# Altium PCB Armadeus.PcbDoc (part 1 of 3)
Units mm, origin at the board's own origin, x right, y up, seen from the top; angles counter-clockwise.
Board outline 152.4 x 101.6 mm, 6 copper layers (Top Layer, MidLayer1, MidLayer2, MidLayer3, MidLayer4, Bottom Layer); 160 components, 306 nets, 1227 pads, 661 vias.
Unrouted connection lines stored in the file: 23.
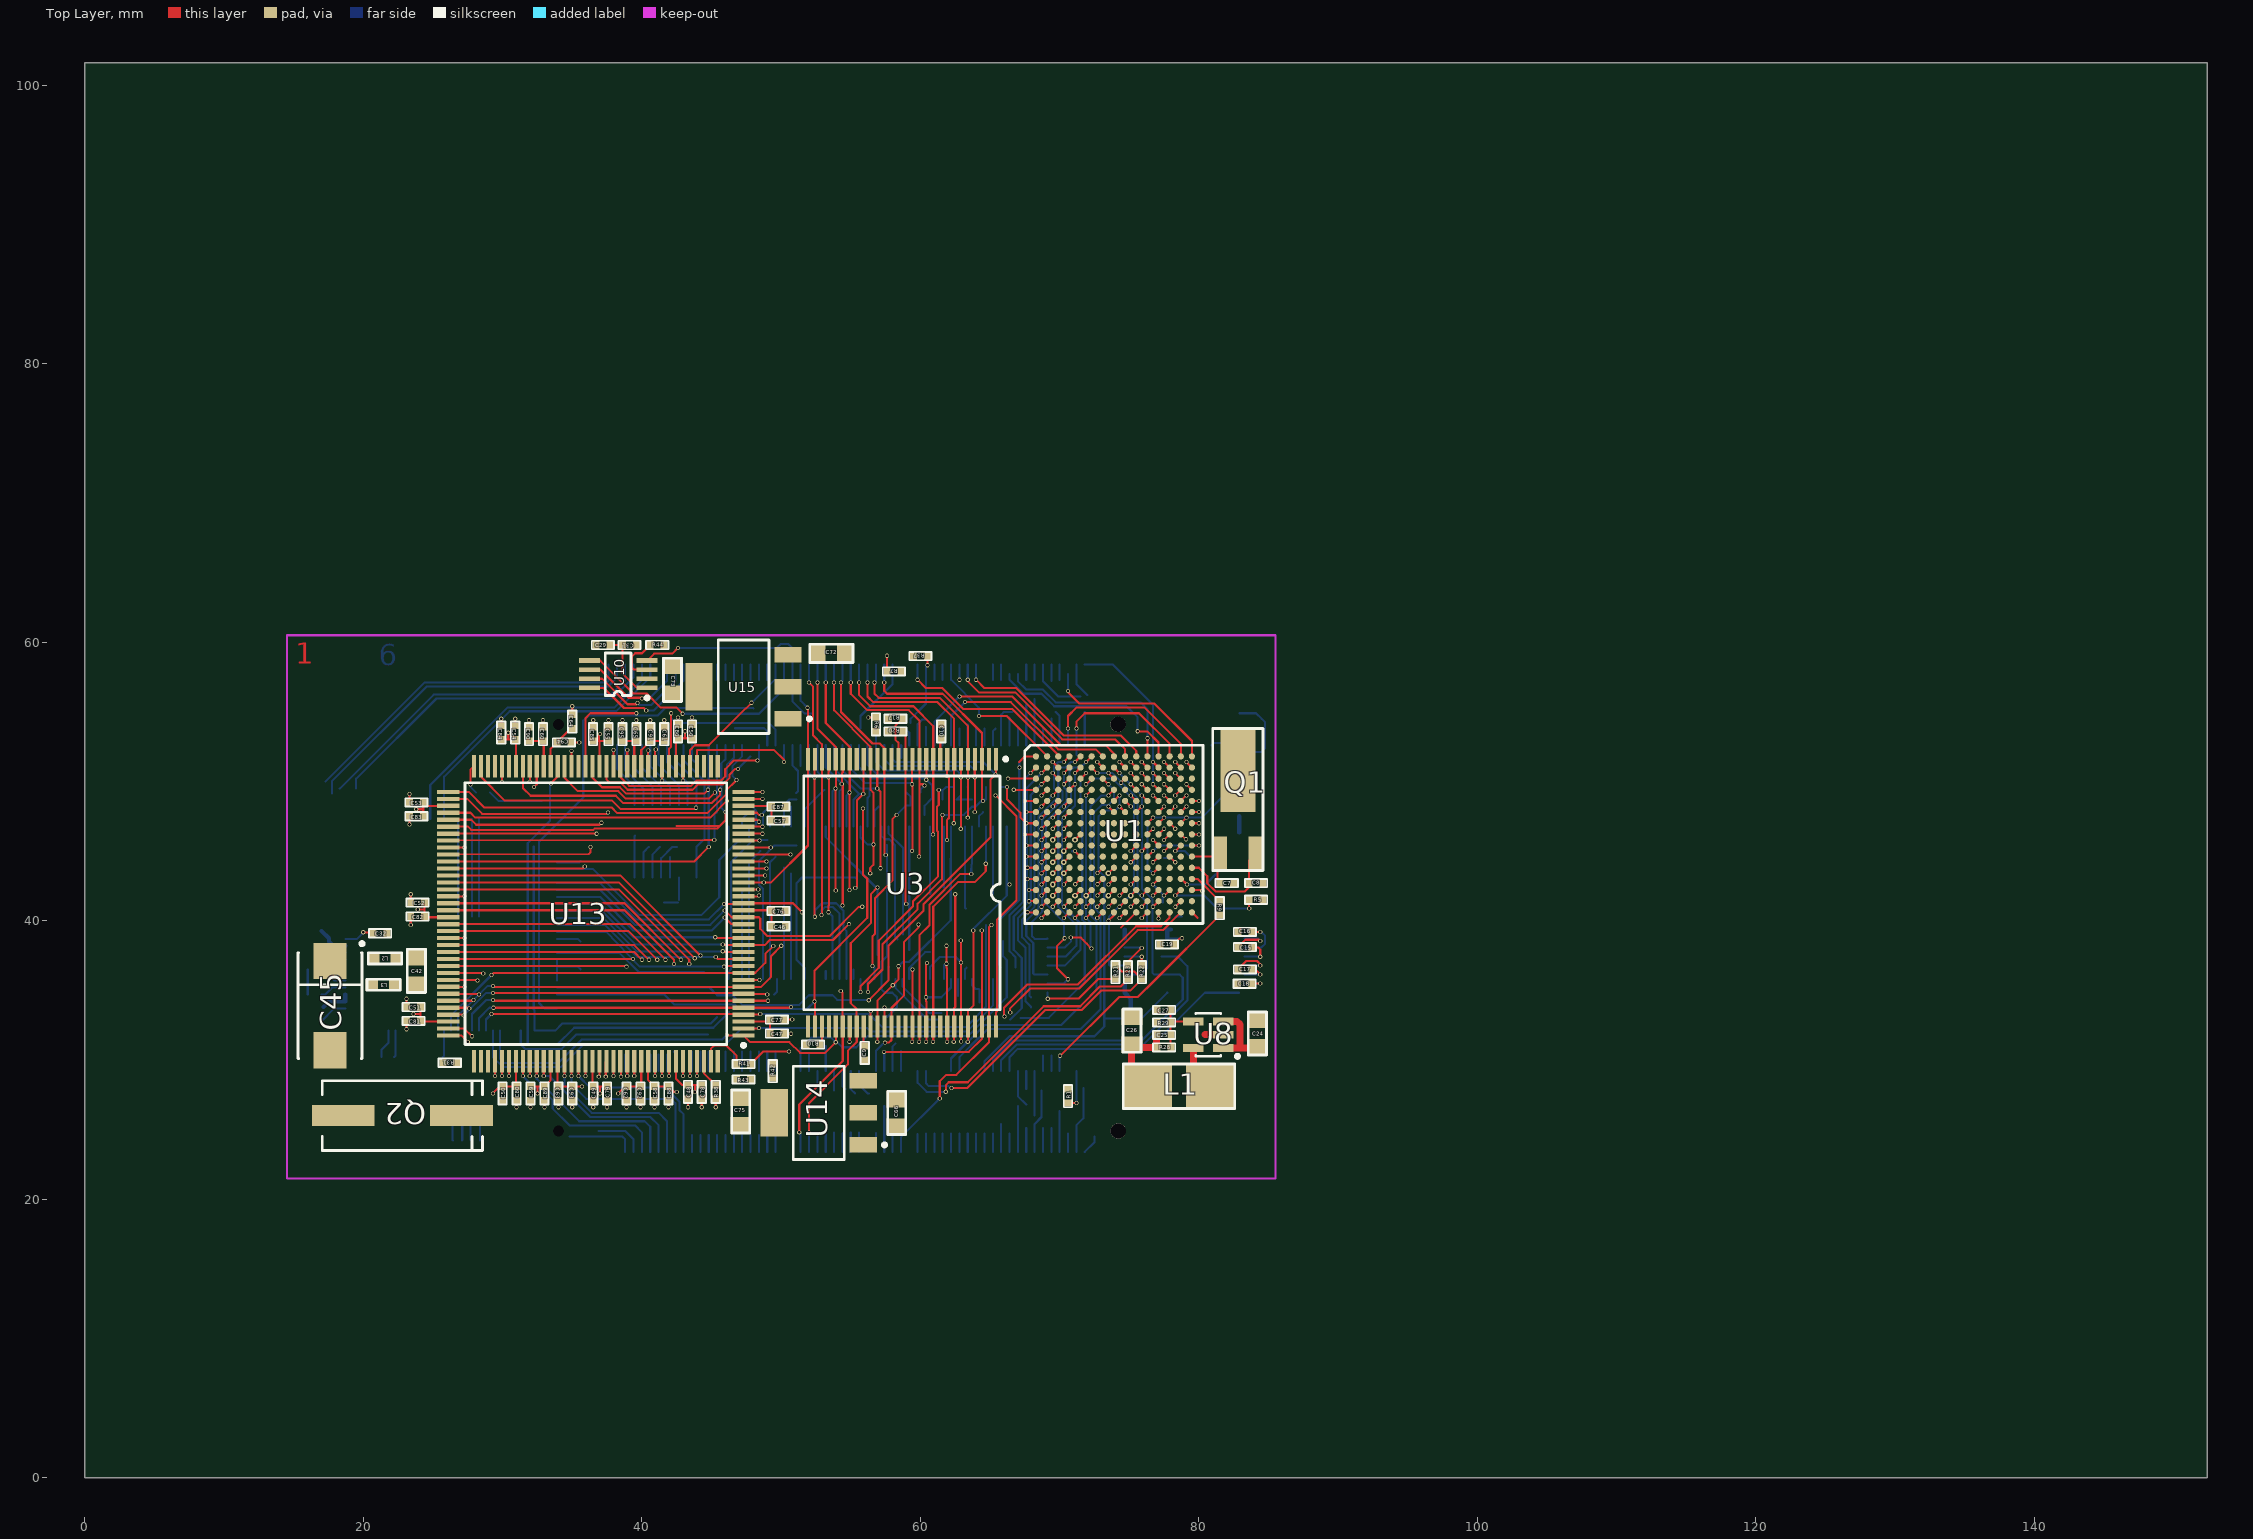
[diagram p0: Top Layer view]
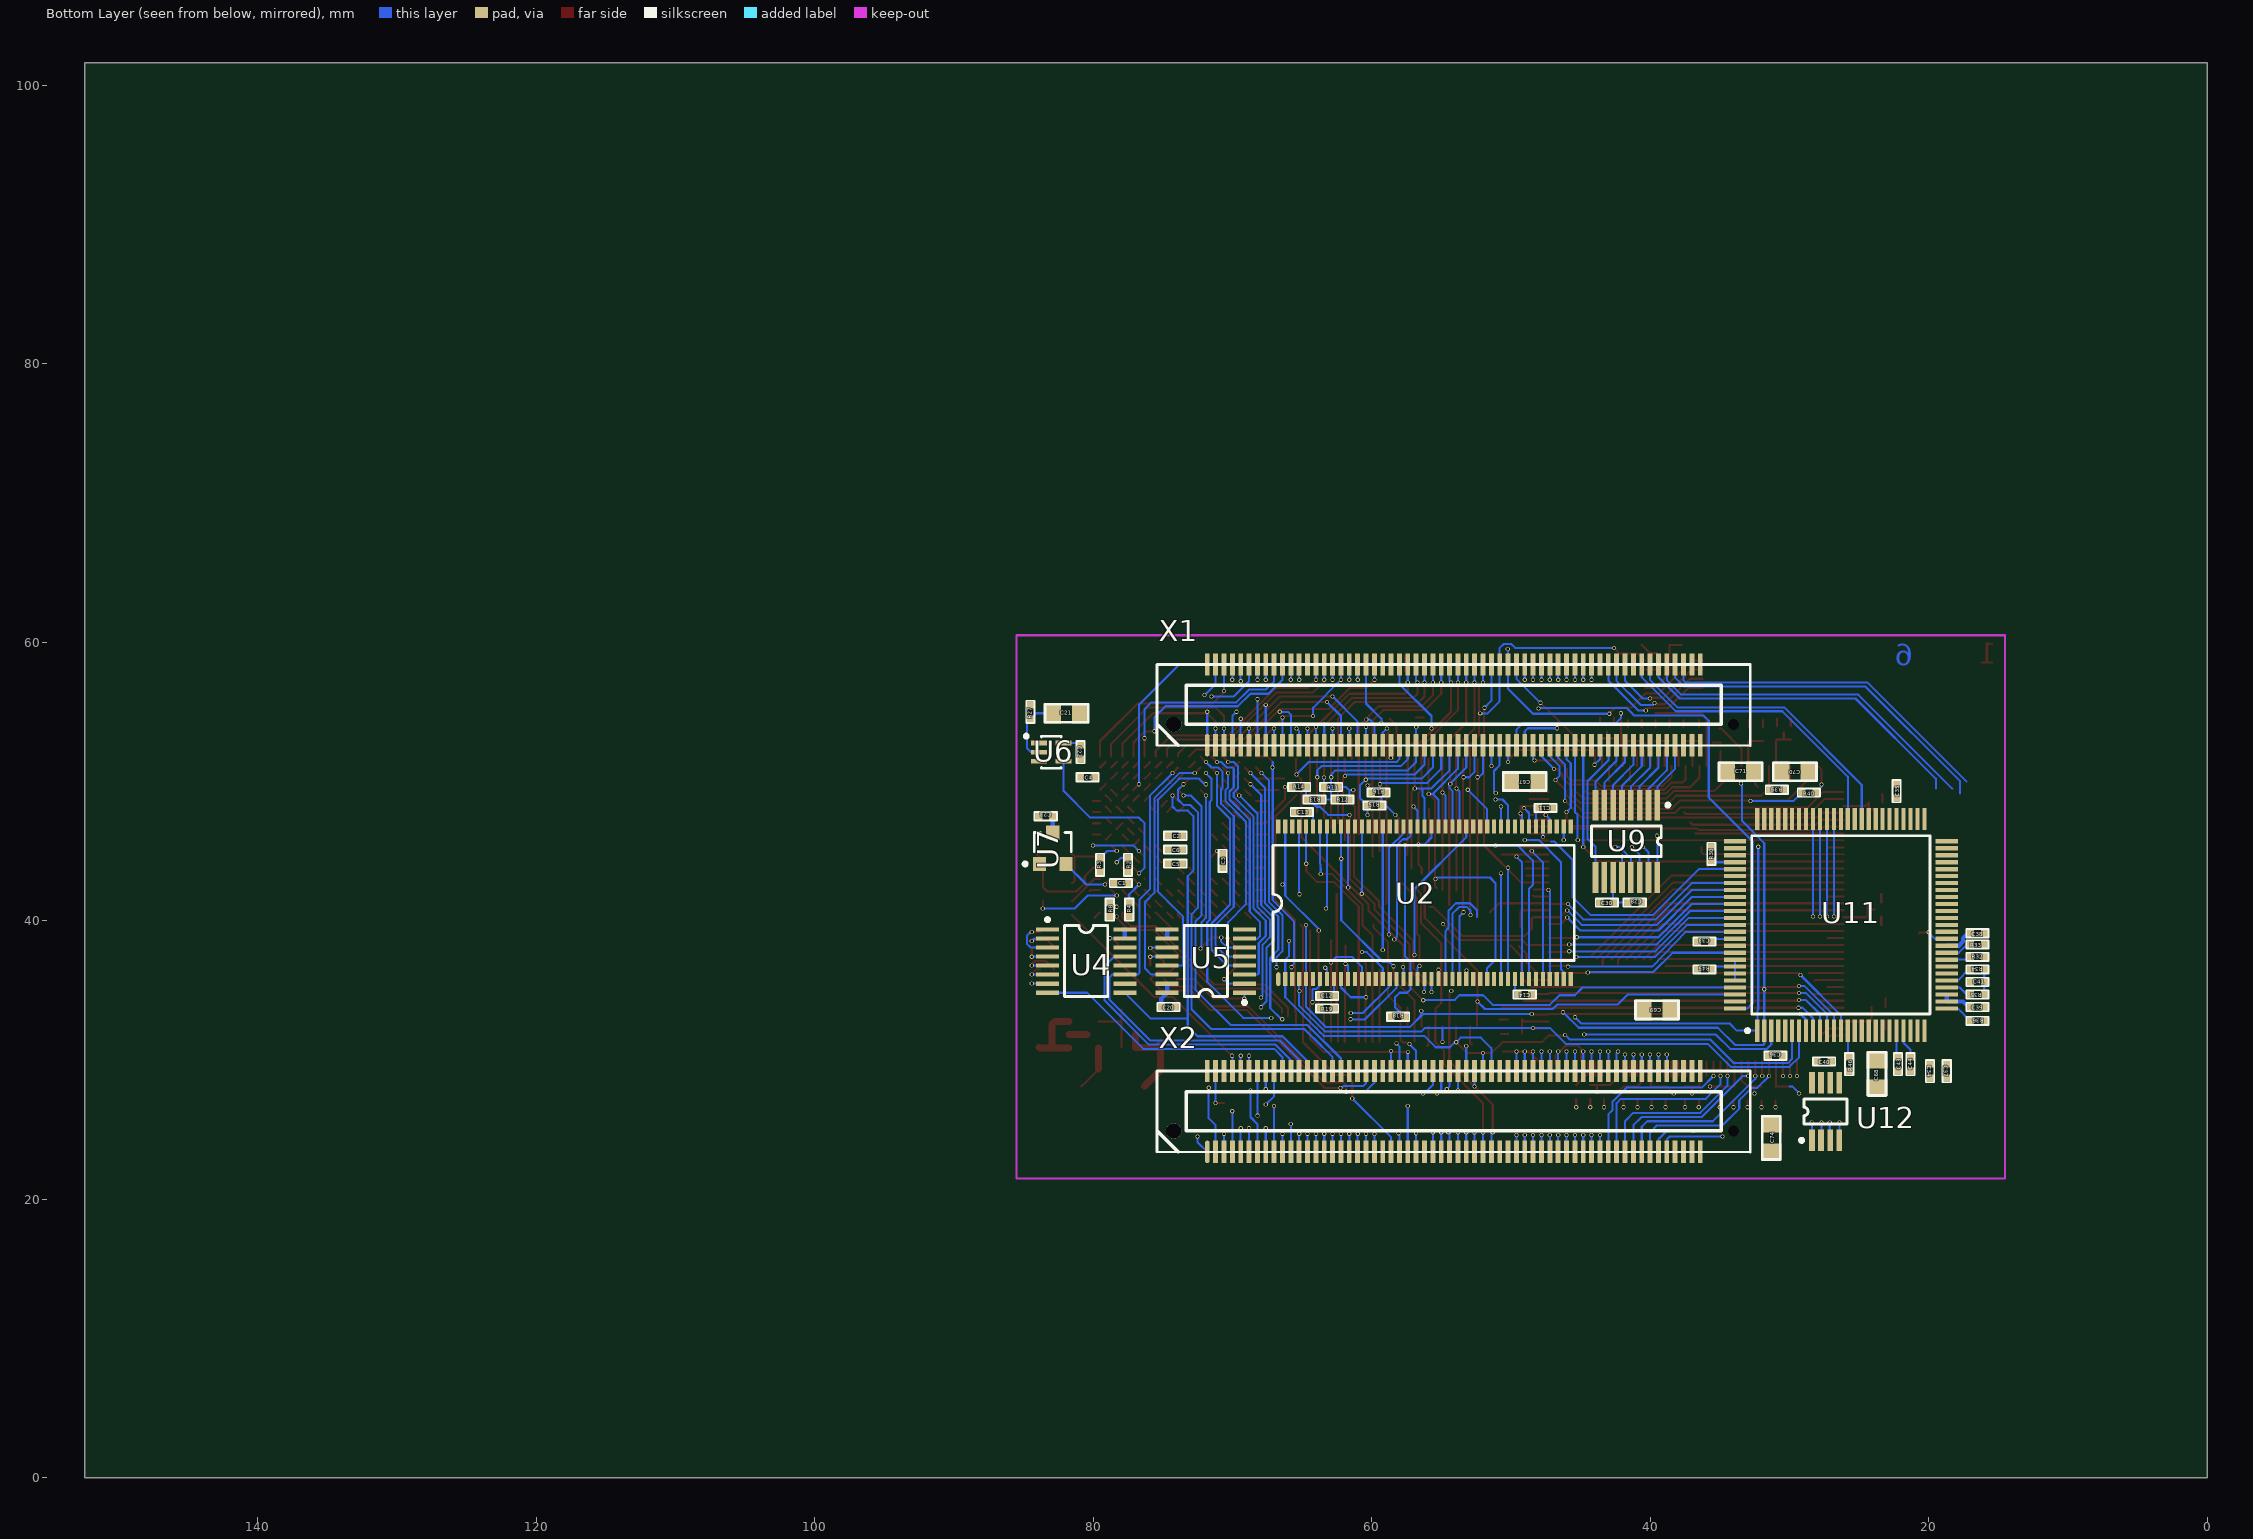
[diagram p1: Bottom Layer view, seen from below]
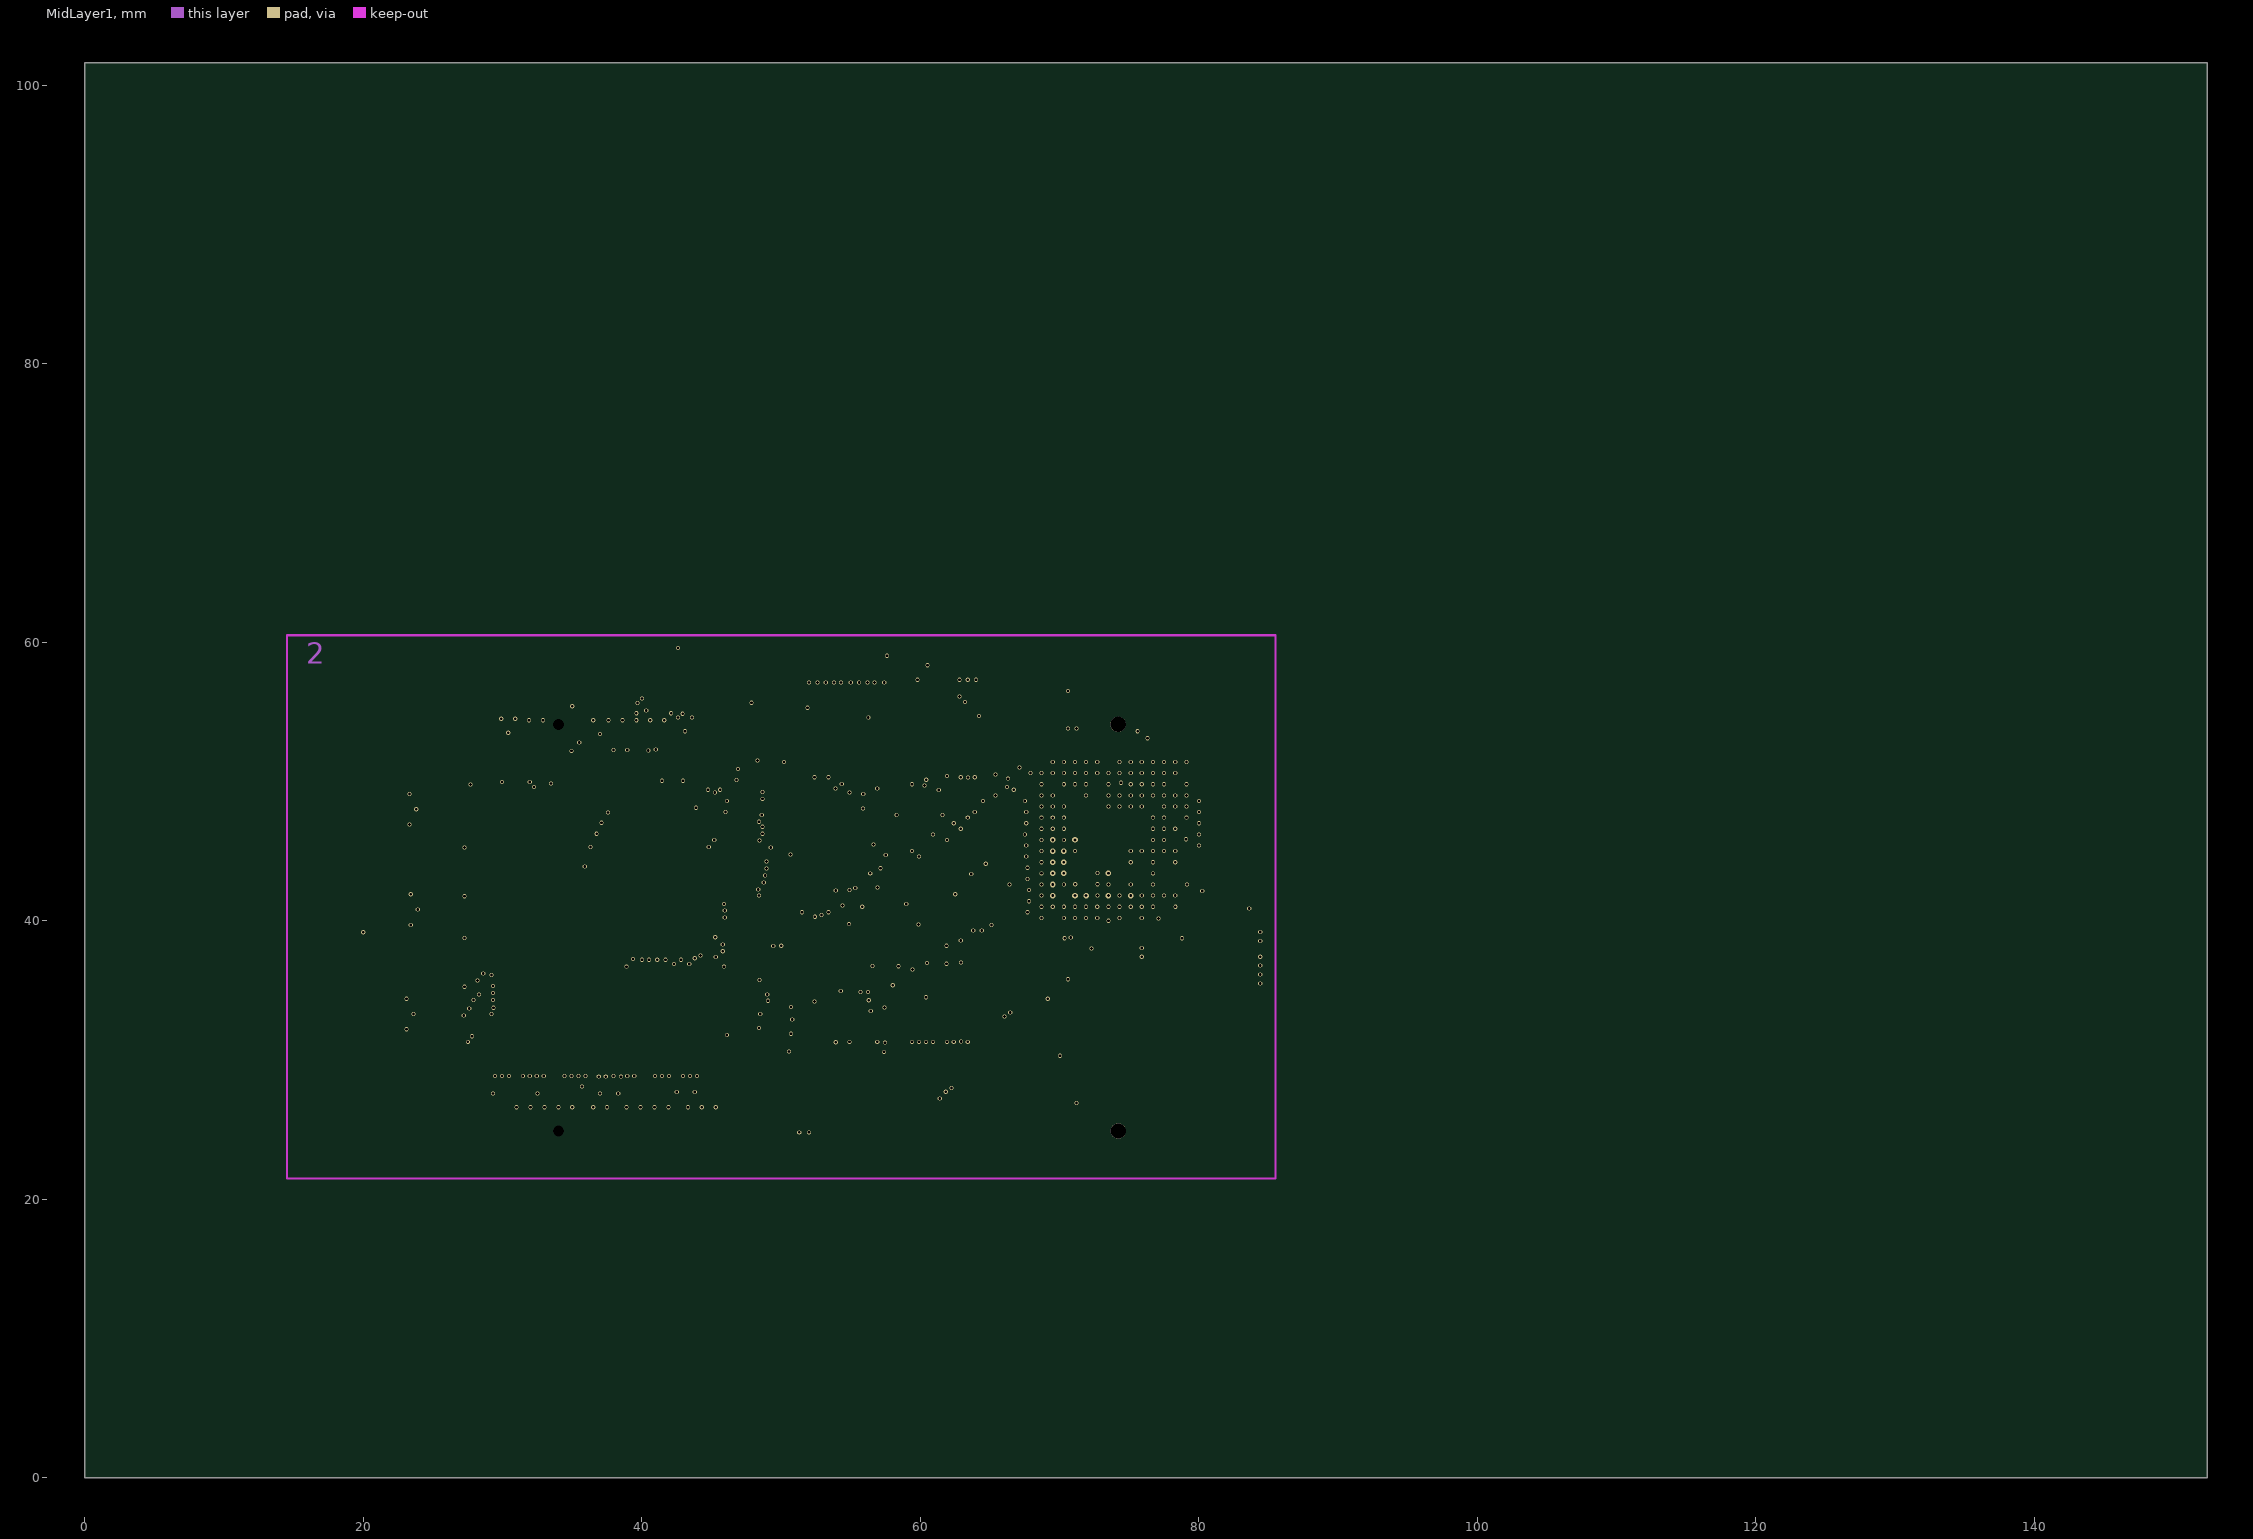
[diagram p2: MidLayer1]
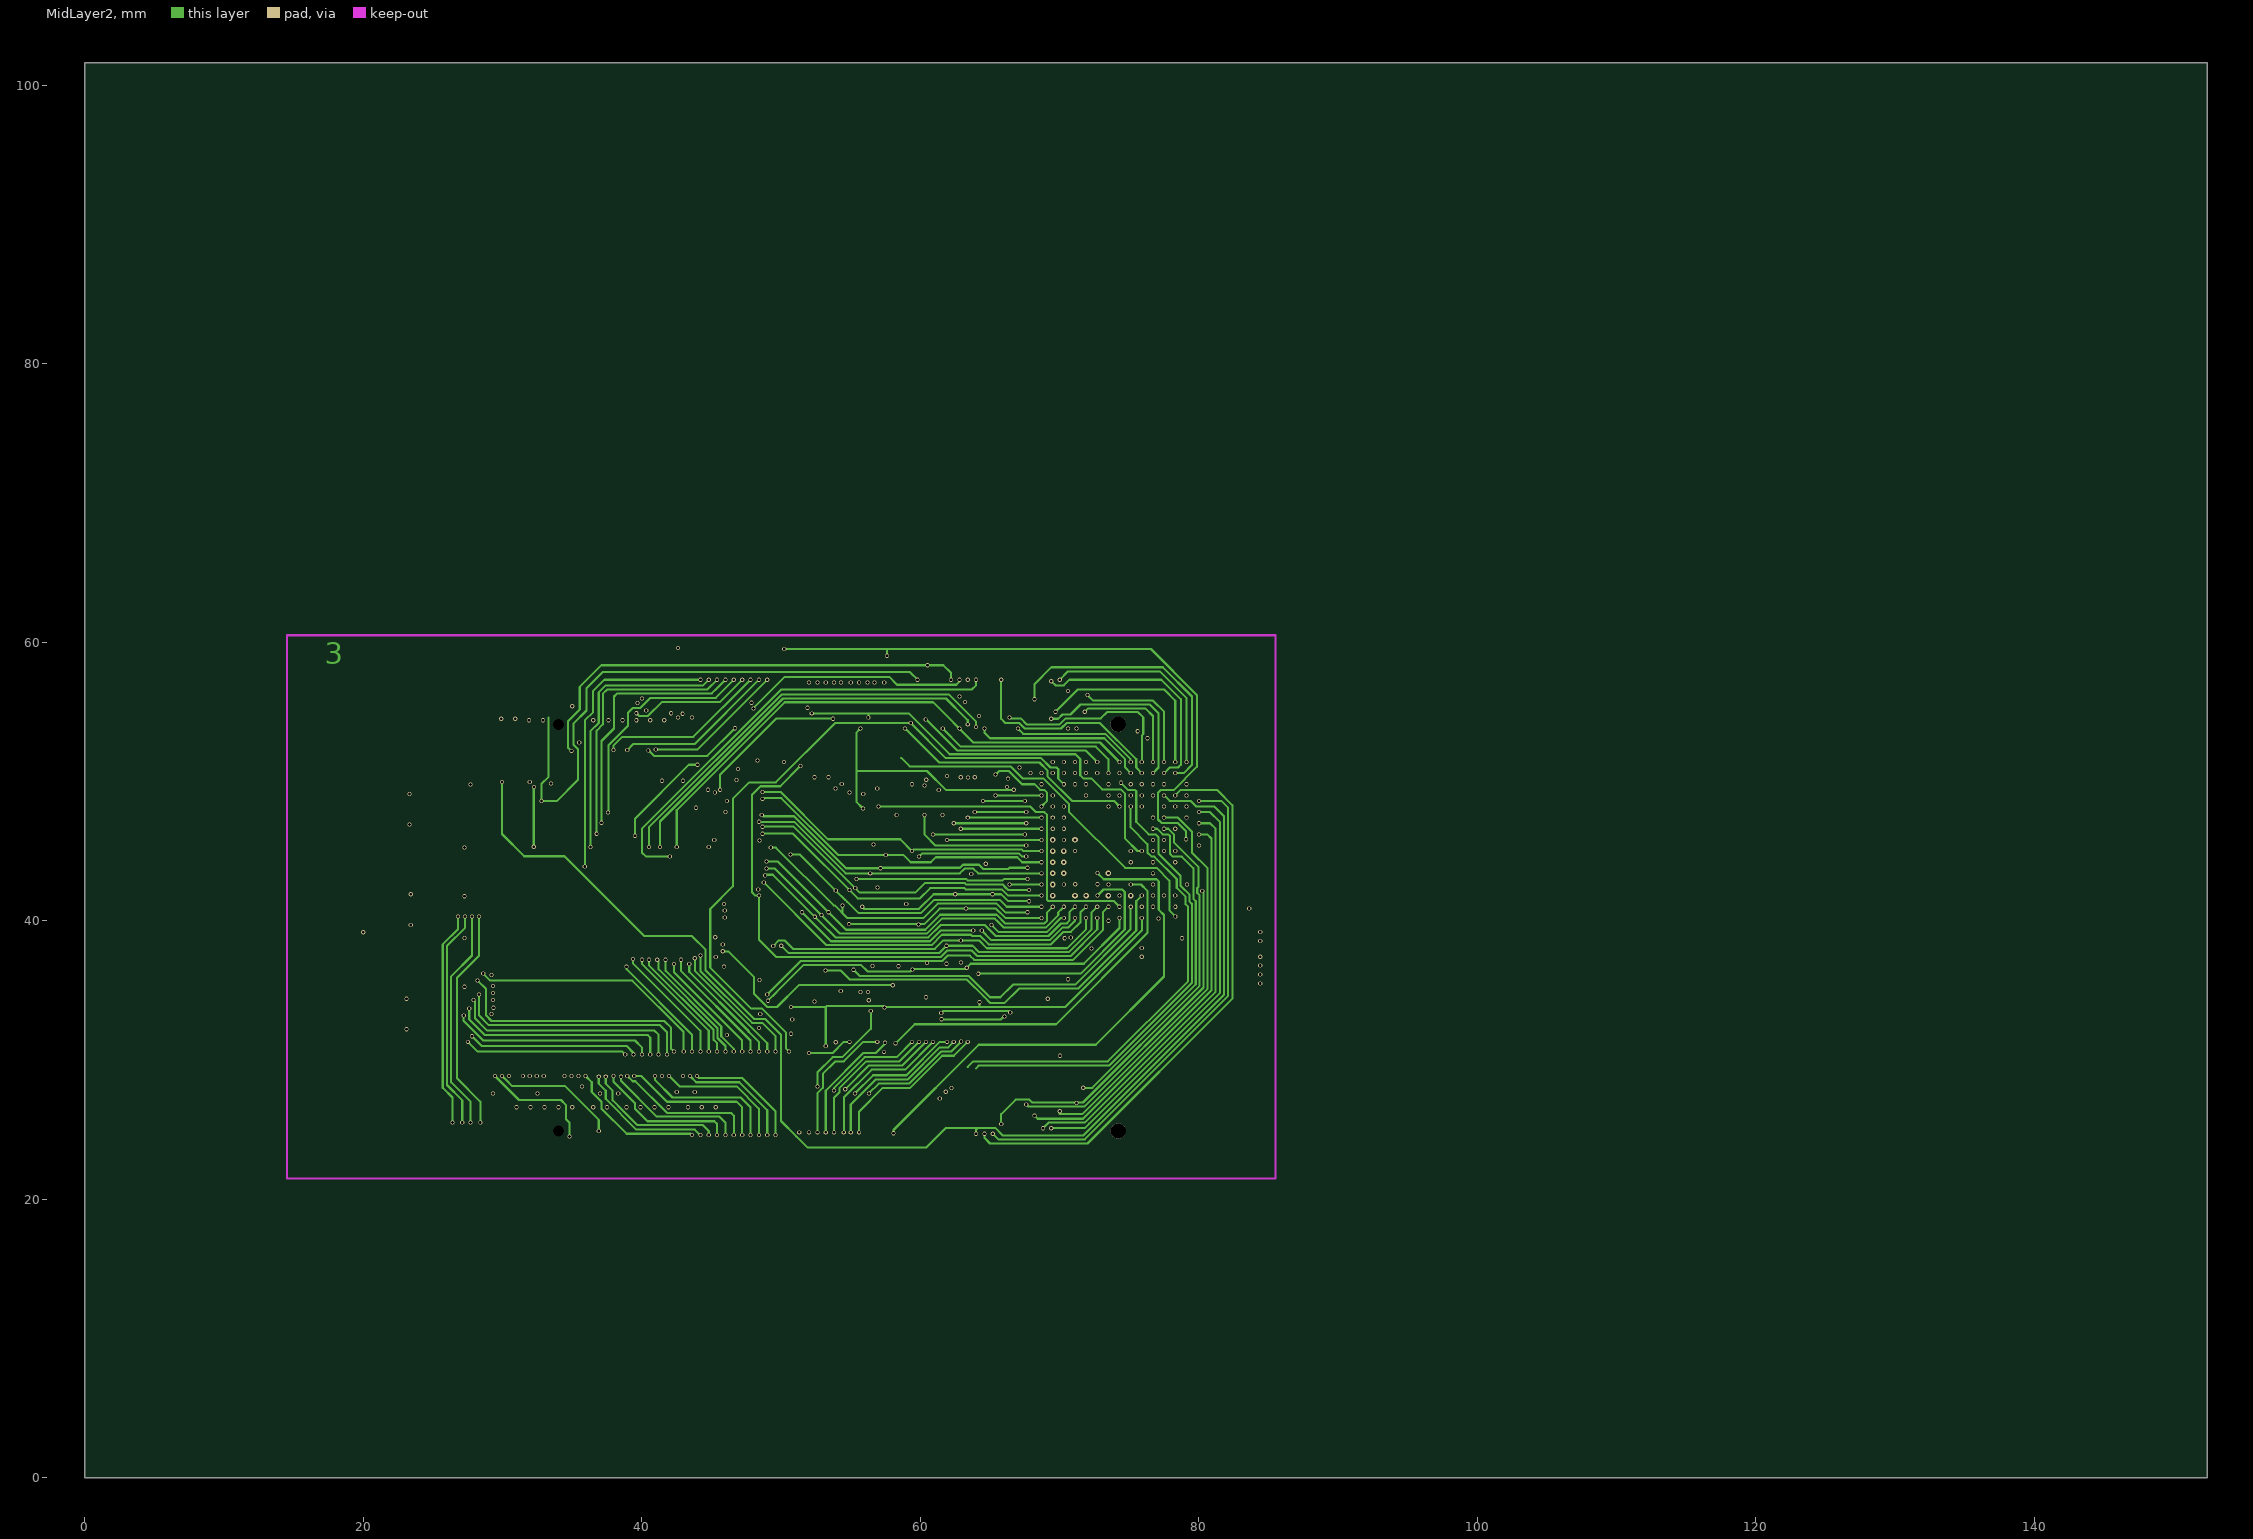
[diagram p3: MidLayer2]
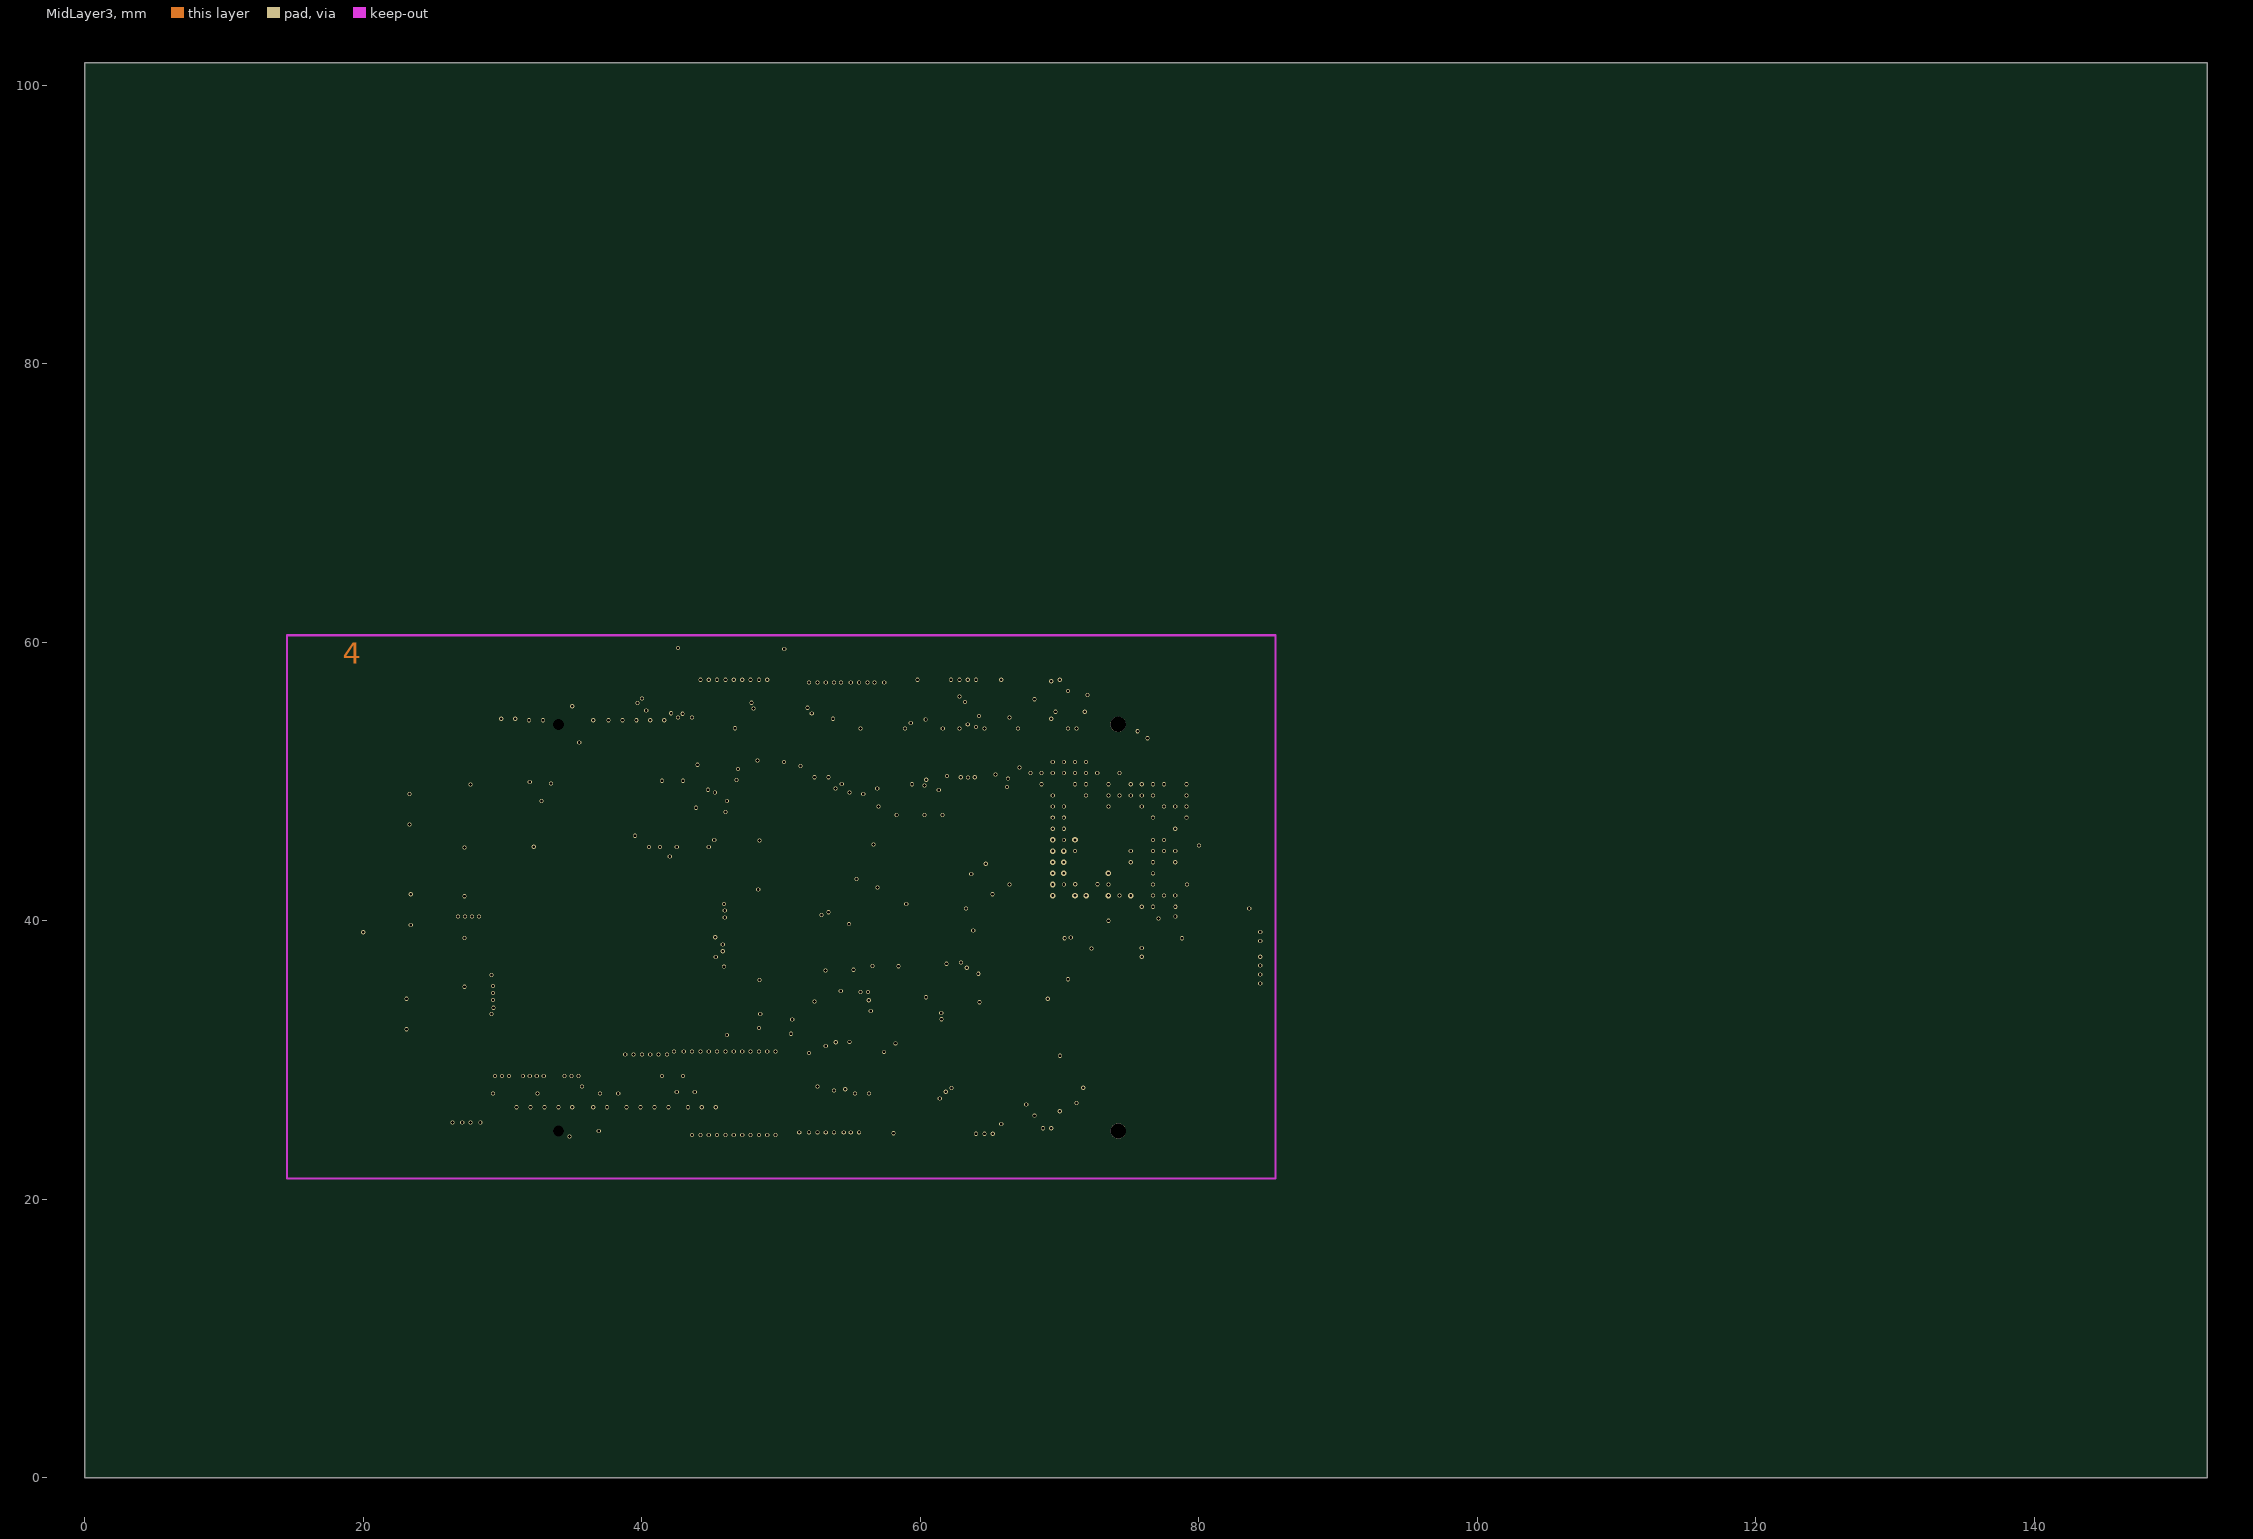
[diagram p4: MidLayer3]
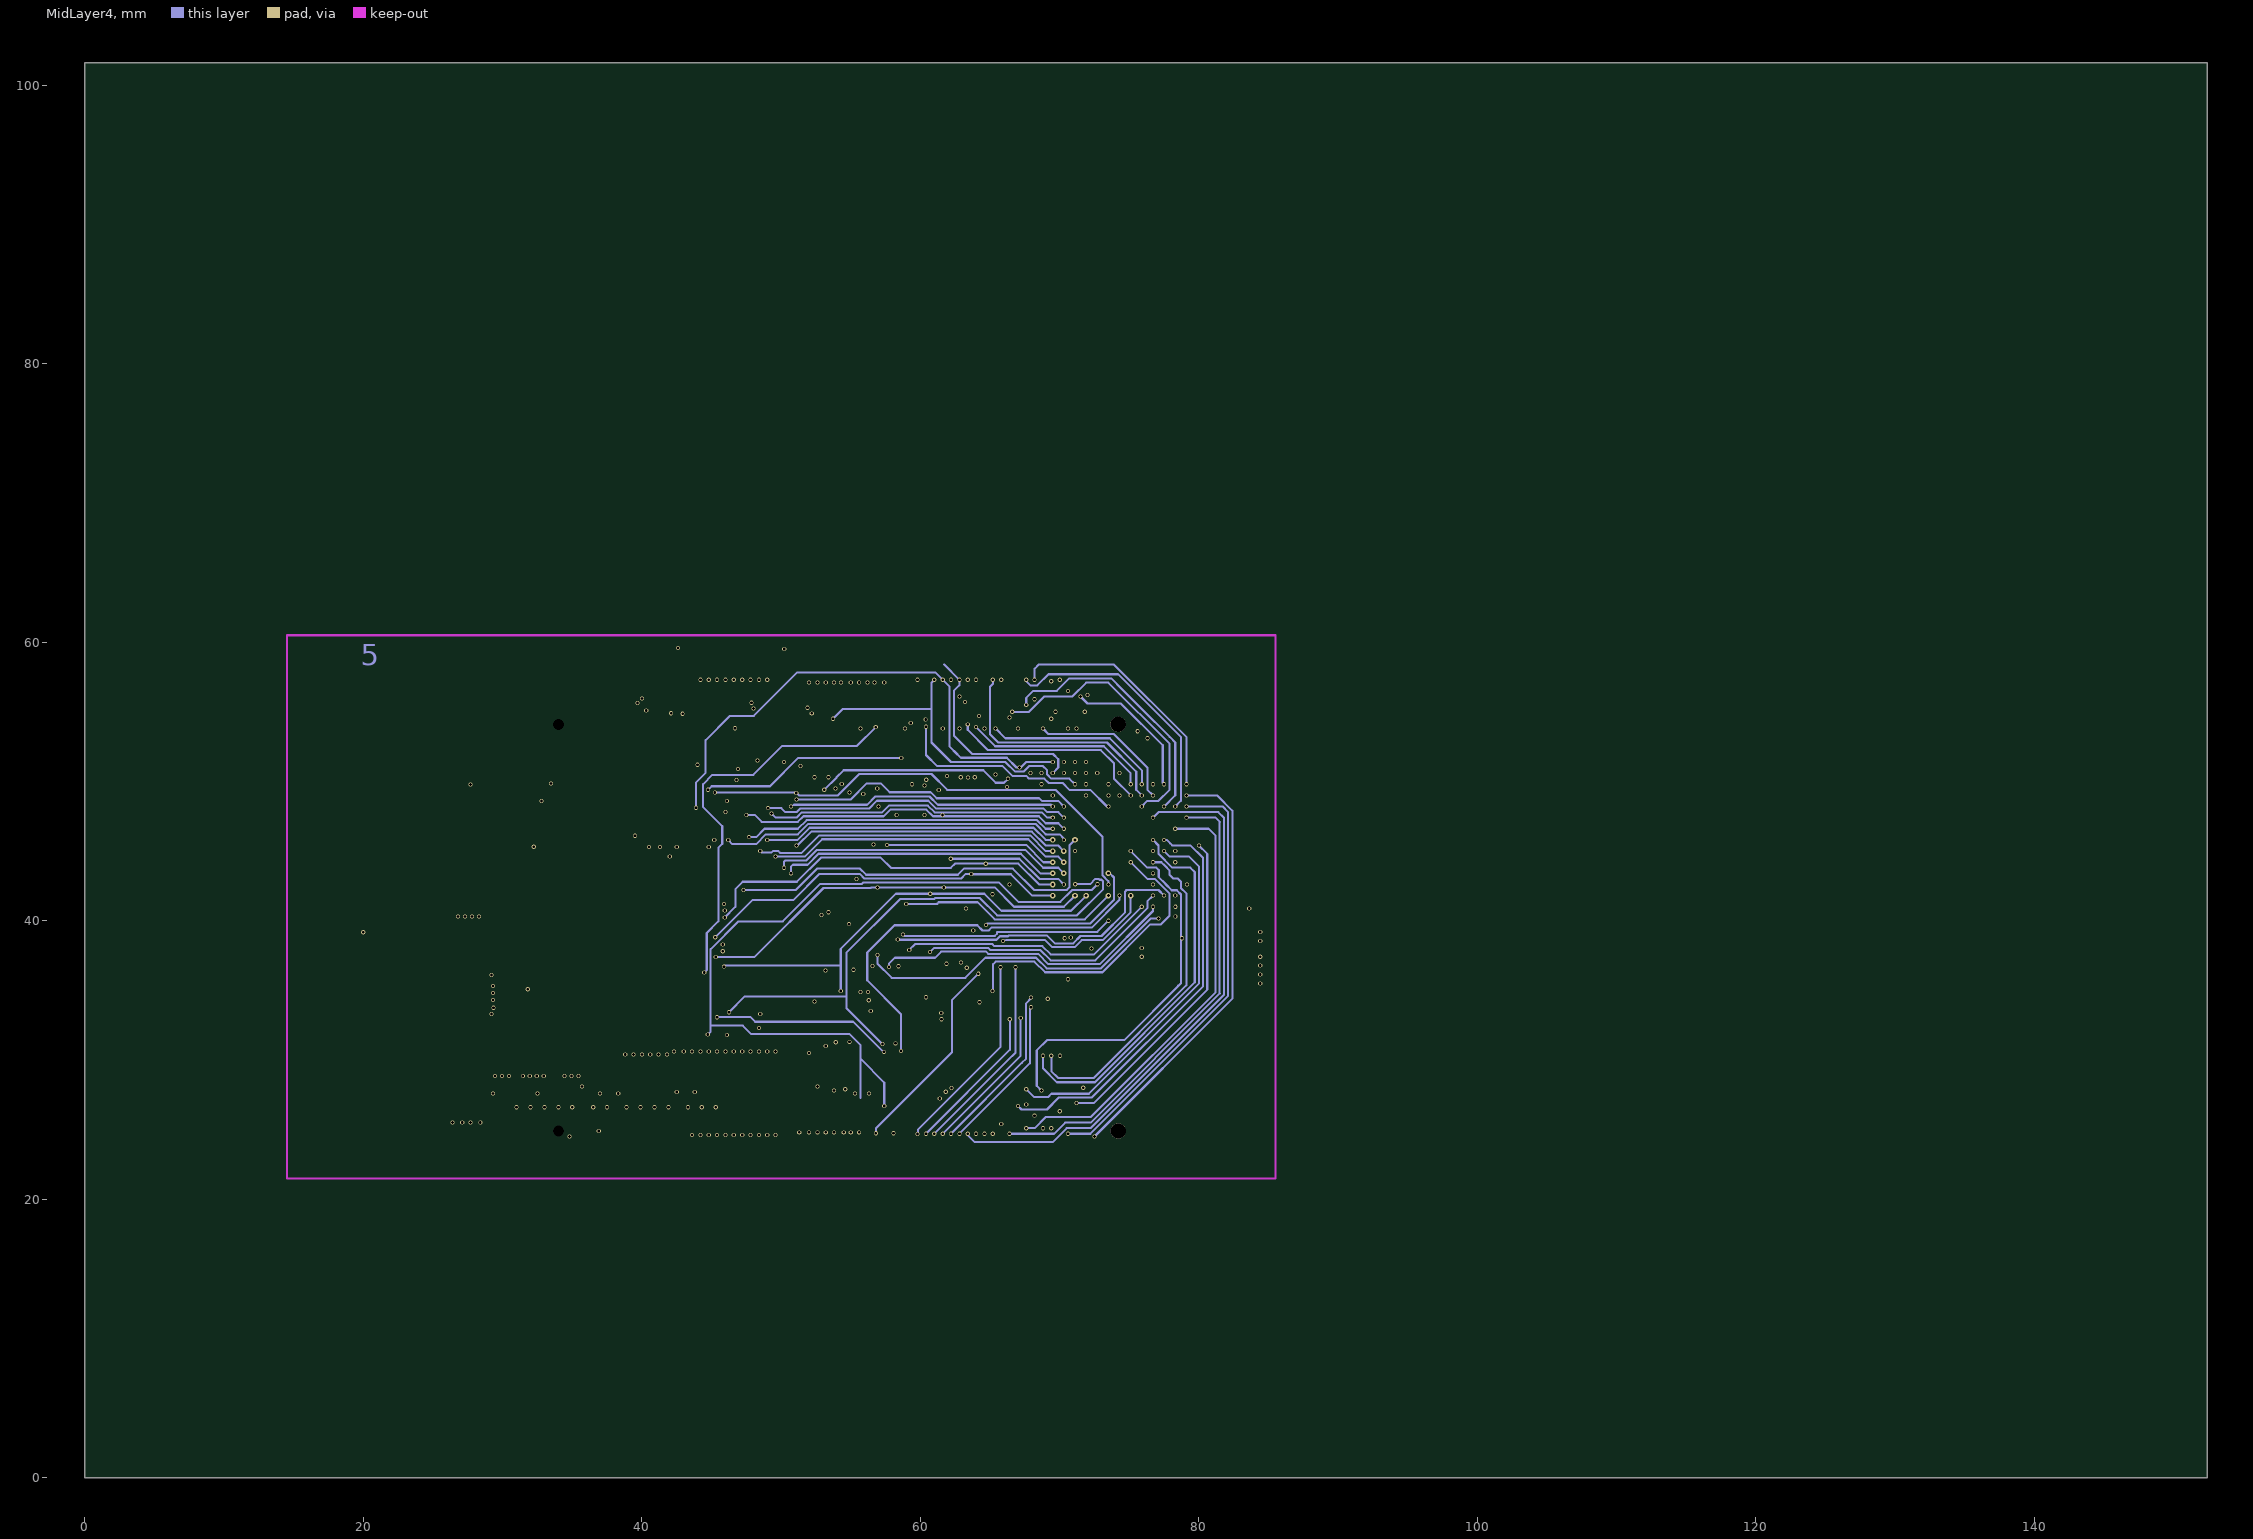
[diagram p5: MidLayer4]

## Layer stack, top to bottom
Top Layer: signal copper 0.0356
Dielectric: core 0.32, FR-4, Dk 4.8
MidLayer1: signal copper 0.0356
Dielectric: prepreg 0.32, FR-4, Dk 4.8
MidLayer2: signal copper 0.0356
Dielectric: core 0.32, FR-4, Dk 4.8
MidLayer3: signal copper 0.0356
Dielectric: prepreg 0.32, FR-4, Dk 4.8
MidLayer4: signal copper 0.0356
Dielectric: core 0.32, FR-4, Dk 4.8
Bottom Layer: signal copper 0.0356

## Board outline
0,0 152.4,0 152.4,101.6 0,101.6

## Design rules (kind name [scope] priority, off if disabled: settings)
Clearance [All] p1: gap=0.125
ComponentClearance [All] p1: gap=0.254 collisioncheckmode=0
PolygonConnect [All] p1: connectstyle=Relief reliefconductorwidth=0.254 reliefentries=4 polygonreliefangle="90 Angle"
RoutingVias [All] p1: holewidth=0.2 width=0.3 viastyle="Through Hole" minholewidth=0.2 minwidth=0.3 maxholewidth=0.7 maxwidth=1
SolderMaskExpansion [All] p1: expansion=0.102
TestPointUsage [All] p1: valid=0 allowmultiple=FALSE
Testpoint [All] p1: side=15 testpointundercomponent=TRUE minsize=1.016 maxsize=2.54 preferedsize=1.524 minholesize=0 maxholesize=1.016 preferedholesize=0.813 testpointgrid=0.025 style=1023 order=1234567890
Width [All] p1: maxlimit=0.5 minlimit=0.15 preferedwidth=0.15 midlayer1_maxwidth=0.3 midlayer2_maxwidth=0.3 midlayer3_maxwidth=0.3 midlayer4_maxwidth=0.3 minimp=50.000000 maximp=50.000000 favimp=50.000000
17 further rules are at their usual default settings.

## Classes and differential pairs
component class RIGHT_CONNECTOR: X2
net class USB_OUT[0..1]: USB_OUT0 USB_OUT1
net class USB[0..7]: USB0 USB1 USB2 USB3 USB4 USB5 USB6 USB7
net class UART_OUT[0..1]: UART_OUT0 UART_OUT1
net class UART[0..7]: UART0 UART1 UART2 UART3 UART4 UART5 UART6 UART7
net class TIM[0..2]: TIM0 TIM1 TIM2
net class SSI_B[0..5]: SSI_B0 SSI_B1 SSI_B2 SSI_B3 SSI_B4 SSI_B5
net class SSI_A[0..5]: SSI_A0 SSI_A1 SSI_A2 SSI_A3 SSI_A4 SSI_A5
net class SPI[0..4]: SPI0 SPI1 SPI2 SPI3 SPI4
net class SD[0..5]: SD0 SD1 SD2 SD3 SD4 SD5
net class LCD[0..24]: LCD0 LCD1 LCD2 LCD3 LCD4 LCD5 LCD6 LCD7 LCD8 LCD9 LCD10 LCD11 LCD12 LCD13 LCD14 LCD15 LCD16 LCD17 LCD18 LCD19 LCD20 LCD21 LCD22 LCD23 LCD24
net class JTAG[0..4]: JTAG0 JTAG1 JTAG2 JTAG3 JTAG4
net class I2C[0..1]: I2C0 I2C1
net class D[0..31]: D0 D1 D2 D3 D4 D5 D6 D7 D8 D9 D10 D11 D12 D13 D14 D15 D16 D17 D18 D19 D20 D21 D22 D23 D24 D25 D26 D27 D28 D29 D30 D31
net class CTRL[0..26]: CTRL0 CTRL1 CTRL2 CTRL3 CTRL4 CTRL5 CTRL6 CTRL7 CTRL8 CTRL9 CTRL10 CTRL11 CTRL12 CTRL13 CTRL14 CTRL15 CTRL16 CTRL17 CTRL18 CTRL19 CTRL20 CTRL21 CTRL22 CTRL23 CTRL24 CTRL25 CTRL26
net class CSI[0..11]: CSI0 CSI1 CSI2 CSI3 CSI4 CSI5 CSI6 CSI7 CSI8 CSI9 CSI10 CSI11
net class A[0..26]: A0 A1 A2 A3 A4 A5 A6 A7 A8 A9 A10 A11 A12 A13 A14 A15 A16 A17 A18 A19 A20 A21 A22 A23 A24 A25 A26
component class "Power & Reset": C21 C22 C23 C24 C25 C26 C27 L1 R27 R28 R29 U6 U7 U8
component class Peripherals: C15 C16 C17 C18 C19 C20 R21 R22 R23 U4 U5
component class Memories: C9 C10 C11 C12 C13 C14 R10 R11 R12 R13 R14 R15 R16 R17 R18 R19 R20 U2 U3
component class CPU: C1 C2 C3 C4 C5 C6 C7 C8 Q1 R1 R2 R3 R4 R5 R6 R7 R8 R9 U1
component class ANALOG: C28 C29 C30 C31 R44 U9 U10
component class ETHERNET: C32 C33 C34 C35 C36 C37 C38 C39 C40 C41 C42 C43 C44 C45 L2 L3 Q2 R30 R31 R32 R33 R34 R35 R36 R45 R46 U11 U12
component class FPGA_BANK: R37 U13
component class FPGA_SUPPLY: C46 C47 C48 C49 C50 C51 C52 C53 C54 C55 C56 C57 C58 C59 C60 C61 C62 C63 C64 C65 C66 C67 C68 C69 C70 C71 C72 C73 C74 C75 C76 C77 C78 C79 C80 C81 C82 C83 C84 C85 C86 C87 C88 C89 C90 C91 C92 C93 C94 C95 R38 R39 R40 R41 R42 R43 U14 U15
component class LEFT_CONNECTOR: X1
net class ADC[0..9]: ADC0 ADC1 ADC2 ADC3 ADC4 ADC5 ADC6 ADC7 ADC8 ADC9
net class DAC[0..2]: DAC0 DAC1 DAC2
net class ETH[0..7]: ETH0 ETH1 ETH2 ETH3 ETH4 ETH5
net class FPGA[0..57]: FPGA0 FPGA1 FPGA2 FPGA3 FPGA4 FPGA5 FPGA6 FPGA7 FPGA8 FPGA9 FPGA10 FPGA11 FPGA12 FPGA13 FPGA14 FPGA15 FPGA16 FPGA17 FPGA18 FPGA19 FPGA20 FPGA21 FPGA22 FPGA23 FPGA24 FPGA25 FPGA26 FPGA27 FPGA28 FPGA29 FPGA30 FPGA31 FPGA32 FPGA33 FPGA34 FPGA35 FPGA36 FPGA37 FPGA38 FPGA39 FPGA40 FPGA41 FPGA42 FPGA43 FPGA44 FPGA45 FPGA46 FPGA47 FPGA48 FPGA49 FPGA50 FPGA51 FPGA52 FPGA53 FPGA54 FPGA55 FPGA56 FPGA57

## Components (designator, comment, footprint, x,y, rotation, side; value= is the part's Value field where it differs from the comment)
C1 "100nF" 0402 78,42.7 r180 bottom
C2 "100nF" 0402 74.1,46.1 r180 bottom
C3 "100nF" 0402 70.7,44.3 r90 bottom
C4 "100nF" 0402 80.4,50.3 r180 bottom
C5 "100nF" 0402 74.1,44.1 r180 bottom
C6 "100nF" 0402 74.1,45.1 r180 bottom
C7 "18pF" 0402 82,42.7 r180 top
C8 "18pF" 0402 84.1,42.7 r180 top
C9 "100nF" 0402 56,30.5 r90 top
C10 "100nF" 0402 61.5,53.6 r270 top
C11 "100nF" 0402 47.5,48.1 r0 bottom
C12 "100nF" 0402 63.2,34.6 r180 bottom
C13 "100nF" 0402 65,47.8 r180 bottom
C14 "100nF" 0402 49,34.7 r0 bottom
C15 "100nF" 0402 83.3,38.1 r180 top
C16 "100nF" 0402 83.3,39.2 r180 top
C17 "100nF" 0402 83.3,36.5 r180 top
C18 "100nF" 0402 83.275,35.475 r180 top
C19 "100nF" 0402 77.7,38.3 r180 top
C20 "100nF" 0402 74.6,33.8 r180 bottom
C21 "4.7uF 6.3V" 0805 81.9,54.9 r0 bottom
C22 "100nF" 0402 80.9,52.1 r270 bottom
C23 "100nF" 0402 83.4,47.5 r0 bottom
C24 "100pF" 0805 84.2,31.9 r270 top
C25 "" 0402 77.5,31.8 r180 top
C26 "10uF 6.3V" 0805 75.2,32.1 r270 top
C27 "4.7uF 6.3V" 0402 77.5,33.6 r0 top
C28 "100nF" 0402 41.1,41.3 r0 bottom
C29 "100nF" 0402 37.2,59.8 r0 top
C30 "10nF" 0402 43.1,41.3 r180 bottom
C31 "10nF" 0402 39.1,59.8 r180 top
C32 "100nF" 0402 21.2,39.1 r0 top
C33 "100nF" 0402 36.1,38.5 r0 bottom
C34 "100nF" 0402 19.9,29.2 r270 bottom
C35 "100nF" 0402 22.3,49.3 r90 bottom
C36 "100nF" 0402 31,30.3 r0 bottom
C37 "100nF" 0402 18.7,29.2 r270 bottom
C38 "100nF" 0402 16.5,39.1 r180 bottom
C39 "100nF" 0402 16.5,33.8 r180 bottom
C40 "100nF" 0402 27.5,29.9 r180 bottom
C41 "100nF" 0402 16.5,35.6 r180 bottom
C42 "10uF 6.3V" 0805 23.8,36.4 r90 top
C43 "22pF" 0402 22.2,29.7 r90 bottom
C44 "22pF" 0402 21.3,29.7 r90 bottom
C45 "100uF 10V" D 17.6,33.9 r270 top
C46 "100nF" 0402 49.8,39.599 r180 top
C47 "100nF" 0402 49.7,31.9 r180 top
C48 "100nF" 0402 43.3,27.7 r90 top
C49 "100nF" 0402 36.501,27.6 r90 top
C50 "100nF" 0402 30,27.6 r90 top
C51 "100nF" 0402 23.6,33.8 r0 top
C52 "100nF" 0402 23.9,41.3 r0 top
C53 "100nF" 0402 23.8,48.5 r0 top
C54 "100nF" 0402 30.9,53.5 r270 top
C55 "100nF" 0402 37.6,53.4 r270 top
C56 "100nF" 0402 43.6,53.6 r270 top
C57 "100nF" 0402 49.8,47.2 r180 top
C58 "100nF" 0402 40.9,27.6 r90 top
C59 "100nF" 0402 32,27.6 r90 top
C60 "100nF" 0402 32.9,53.4 r270 top
C61 "100nF" 0402 41.6,53.4 r270 top
C62 "100nF" 0402 38.9,27.6 r90 top
C63 "100nF" 0402 34,27.6 r90 top
C64 "100nF" 0402 35,54.3 r270 top
C65 "100nF" 0402 39.6,53.4 r270 top
C66 "10uF 6.3V" 0805 58.3,26.2 r90 top
C67 "10uF 6.3V" 0805 49,50 r0 bottom
C68 "10uF 6.3V" 0805 23.7,29 r90 bottom
C69 "10uF 6.3V" 0805 39.5,33.6 r0 bottom
C70 "10uF 6.3V" 0805 29.6,50.7 r0 bottom
C71 "10uF 6.3V" 0805 33.5,50.7 r180 bottom
C72 "10uF 6.3V" 0805 53.6,59.2 r180 top
C73 "10uF 6.3V" 0805 42.2,57.3 r270 top
C74 "10uF 6.3V" 0805 31.3,24.4 r90 bottom
C75 "10uF 6.3V" 0805 47.1,26.3 r90 top
C76 "10nF" 0402 49.8,40.7 r180 top
C77 "10nF" 0402 49.7,32.9 r180 top
C78 "10nF" 0402 44.3,27.7 r90 top
C79 "10nF" 0402 37.5,27.6 r90 top
C80 "10nF" 0402 31,27.6 r90 top
C81 "10nF" 0402 23.6,32.801 r0 top
C82 "10nF" 0402 23.9,40.301 r0 top
C83 "10nF" 0402 23.8,47.5 r0 top
C84 "10nF" 0402 29.9,53.5 r270 top
C85 "10nF" 0402 36.5,53.4 r270 top
C86 "10nF" 0402 42.601,53.6 r270 top
C87 "10nF" 0402 49.8,48.199 r180 top
C88 "10nF" 0402 41.9,27.6 r90 top
C89 "10nF" 0402 32.999,27.6 r90 top
C90 "10nF" 0402 31.901,53.4 r270 top
C91 "10nF" 0402 40.6,53.4 r270 top
C92 "10nF" 0402 39.9,27.6 r90 top
C93 "10nF" 0402 34.999,27.6 r90 top
C94 "10nF" 0402 34.4,52.8 r180 top
C95 "10nF" 0402 38.6,53.4 r270 top
L1 "10uH 650mA 240m" Self_1812 78.47,28.111 r180 top
L2 "Bead Z=200, 200mA" 0603 21.6,37.3 r180 top
L3 "Bead Z=200, 200mA" 0603 21.5,35.4 r180 top
Q1 "32.768kHz 20ppm" Crystal_SMD_Cyl 82.8,44.8 r0 top
Q2 "25MHz 50ppm" CSM-7 22.8,26 r180 top
R1 "1K" 0402 70.6,27.4 r90 top
R2 "1K" 0402 77.5,44 r90 bottom
R3 "1K" 0402 79.5,44 r90 bottom
R4 "1K" 0402 77.4,40.8 r90 bottom
R5 "1K" 0402 84.1,41.5 r180 top
R6 "1K" 0402 56.8,54.1 r270 top
R7 "1K" 0402 58.1,57.9 r0 top
R8 "0" 0402 78.8,40.8 r270 bottom
R9 "0" 0402 81.5,40.9 r270 top
R10 "1K" 0402 52.3,31.1 r0 top
R11 "0" 0402 62.9,49.6 r180 bottom
R12 "0" 0402 62.1,48.7 r180 bottom
R13 "0" 0402 64.1,48.7 r0 bottom
R14 "0" 0402 65.2,49.6 r180 bottom
R15 "0" 0402 59.8,48.26 r180 bottom
R16 "0" 0402 59.5,49.2 r180 bottom
R17 "0" 0402 58.2,54.5 r180 top
R18 "10K" 0402 58.1,33.1 r0 bottom
R19 "10K" 0402 63.2,33.7 r180 bottom
R20 "10K" 0402 58.2,53.6 r180 top
R21 "1K5" 0402 74,36.3 r270 top
R22 "33" 0402 75.9,36.3 r270 top
R23 "33" 0402 74.9,36.3 r270 top
R27 "100K" 0402 84.5,55 r90 bottom
R28 "470K" 0402 77.5,30.9 r180 top
R29 "180" 0402 77.5,32.7 r0 top
R30 "10K" 0402 35.6,44.8 r90 bottom
R31 "10K" 0402 26.2,29.8 r180 top
R32 "49.9" 0402 16.5,37.4 r180 bottom
R33 "49.9" 0402 16.5,38.3 r180 bottom
R34 "49.9" 0402 16.5,36.5 r0 bottom
R35 "49.9" 0402 16.5,34.7 r0 bottom
R36 "6K81" 0402 16.5,32.8 r0 bottom
R37 "4K75" 0402 60,59 r180 top
R38 "10K" 0402 45.3,27.7 r90 top
R39 "332" 0402 30.9,49.4 r0 bottom
R40 "56" 0402 28.6,49.2 r180 bottom
R41 "56" 0402 47.3,29.7 r180 top
R42 "{110}" 0402 49.4,29.2 r90 top
R43 "{110}" 0402 47.3,28.6 r180 top
R44 "1K" 0402 41.1,59.8 r180 top
R45 "1K" 0402 36.1,36.5 r0 bottom
R46 "1K" 0402 25.7,29.7 r90 bottom
U1 "*" BGA225X15 68.3,51.8 r0 top
U2 "MT48LCxM32TG_1" TSOP86-400 66.7,35.8 r90 bottom
U3 "MT28FxxxJ3RG" TSOP56 58.675,42 r180 top
U4 "MAX3221ECAE" TSSOP16 80.5,37.1 r270 bottom
U5 "ISP1106" TSSOP16 71.9,37.1 r90 bottom
U6 "74AHCT1G14" SC70-5 83,52.1 r270 bottom
U7 "FM1233A" SOT23-3 82.9,45.2 r180 bottom
U8 "TPS62200" SOT23-5 80.67,31.811 r90 top
U9 "MAX1027" QSOP16 41.7,45.7 r0 bottom
U10 "MAX5821" UMAX8 38.3,57.7 r90 top
U11 "DM9000E" LQFP100 26.3,39.7 r90 bottom
U12 "93C46" MSOP8 27.4,26.3 r180 bottom
U13 "XC3S400-5TQ144C" TQ144 36.7,40.5 r180 top
U14 "FAN1112" SOT223 52.7,26.2 r90 top
U15 "FAN1086" SOT223 47.3,56.8 r90 top
X1 "FX8-120P" FX8-120P 71.8,52.6 r90 bottom
X2 "FX8-120P" FX8-120P 71.8,23.4 r90 bottom

## Footprints (in the part's own frame and the unit in brackets; to place one, negate y for a bottom-side part, rotate by r counter-clockwise, add the part's x,y. Pads: shape width x height; smd on the part's side, far side on the other; paste and mask are expansions set on the pad)
0402 [mm]
  rect 0.5x0.6 smd: 1(-0.5,0) 2(0.5,0)
  silkscreen extent -0.8,-0.3 0.8,0.3
0603 [mm]
  rect 0.9x0.8 smd: 1(-0.8,0) 2(0.9,0)
  silkscreen extent -1.15,-0.4 1.25,0.4
0805 [mm]
  rect 1.2x1.5 smd: 1(-1,0) 2(1,0)
  silkscreen extent -1.55,-0.65 1.55,0.65
BGA225X15 [mm]
  round 0.45 smd: A1(0,0) A2(0.8,0) A3(1.6,0) A4(2.4,0) A5(3.2,0) A6(4,0) A7(4.8,0) A8(5.6,0) A9(6.4,0) A10(7.2,0) A11(8,0) A12(8.8,0) A13(9.6,0) A14(10.4,0) A15(11.2,0) B1(0,-0.8) B2(0.8,-0.8) B3(1.6,-0.8) B4(2.4,-0.8) B5(3.2,-0.8) B6(4,-0.8) B7(4.8,-0.8) B8(5.6,-0.8) B9(6.4,-0.8) B10(7.2,-0.8) B11(8,-0.8) B12(8.8,-0.8) B13(9.6,-0.8) B14(10.4,-0.8) B15(11.2,-0.8) C1(0,-1.6) C2(0.8,-1.6) C3(1.6,-1.6) C4(2.4,-1.6) C5(3.2,-1.6) C6(4,-1.6) C7(4.8,-1.6) C8(5.6,-1.6) C9(6.4,-1.6) C10(7.2,-1.6) C11(8,-1.6) C12(8.8,-1.6) C13(9.6,-1.6) C14(10.4,-1.6) C15(11.2,-1.6) D1(0,-2.4) D2(0.8,-2.4) D3(1.6,-2.4) D4(2.4,-2.4) D5(3.2,-2.4) D6(4,-2.4) D7(4.8,-2.4) D8(5.6,-2.4) D9(6.4,-2.4) D10(7.2,-2.4) D11(8,-2.4) D12(8.8,-2.4) D13(9.6,-2.4) D14(10.4,-2.4) D15(11.2,-2.4) E1(0,-3.2) E2(0.8,-3.2) E3(1.6,-3.2) E4(2.4,-3.2) E5(3.2,-3.2) E6(4,-3.2) E7(4.8,-3.2) E8(5.6,-3.2) E9(6.4,-3.2) E10(7.2,-3.2) E11(8,-3.2) E12(8.8,-3.2) E13(9.6,-3.2) E14(10.4,-3.2) E15(11.2,-3.2) F1(0,-4) F2(0.8,-4) F3(1.6,-4) F4(2.4,-4) F5(3.2,-4) F6(4,-4) F7(4.8,-4) F8(5.6,-4) F9(6.4,-4) F10(7.2,-4) F11(8,-4) F12(8.8,-4) F13(9.6,-4) F14(10.4,-4) F15(11.2,-4) G1(0,-4.8) G2(0.8,-4.8) G3(1.6,-4.8) G4(2.4,-4.8) G5(3.2,-4.8) G6(4,-4.8) G7(4.8,-4.8) G8(5.6,-4.8) G9(6.4,-4.8) G10(7.2,-4.8) G11(8,-4.8) G12(8.8,-4.8) G13(9.6,-4.8) G14(10.4,-4.8) G15(11.2,-4.8) H1(0,-5.6) H2(0.8,-5.6) H3(1.6,-5.6) H4(2.4,-5.6) H5(3.2,-5.6) H6(4,-5.6) H7(4.8,-5.6) H8(5.6,-5.6) H9(6.4,-5.6) H10(7.2,-5.6) H11(8,-5.6) H12(8.8,-5.6) H13(9.6,-5.6) H14(10.4,-5.6) H15(11.2,-5.6) J1(0,-6.4) J2(0.8,-6.4) J3(1.6,-6.4) J4(2.4,-6.4) J5(3.2,-6.4) J6(4,-6.4) J7(4.8,-6.4) J8(5.6,-6.4) J9(6.4,-6.4) J10(7.2,-6.4) J11(8,-6.4) J12(8.8,-6.4) J13(9.6,-6.4) J14(10.4,-6.4) J15(11.2,-6.4) K1(0,-7.2) K2(0.8,-7.2) K3(1.6,-7.2) K4(2.4,-7.2) K5(3.2,-7.2) K6(4,-7.2) K7(4.8,-7.2) K8(5.6,-7.2) K9(6.4,-7.2) K10(7.2,-7.2) K11(8,-7.2) K12(8.8,-7.2) K13(9.6,-7.2) K14(10.4,-7.2) K15(11.2,-7.2) L1(0,-8) L2(0.8,-8) L3(1.6,-8) L4(2.4,-8) L5(3.2,-8) L6(4,-8) L7(4.8,-8) L8(5.6,-8) L9(6.4,-8) L10(7.2,-8) L11(8,-8) L12(8.8,-8) L13(9.6,-8) L14(10.4,-8) L15(11.2,-8) M1(0,-8.8) M2(0.8,-8.8) M3(1.6,-8.8) M4(2.4,-8.8) M5(3.2,-8.8) M6(4,-8.8) M7(4.8,-8.8) M8(5.6,-8.8) M9(6.4,-8.8) M10(7.2,-8.8) M11(8,-8.8) M12(8.8,-8.8) M13(9.6,-8.8) M14(10.4,-8.8) M15(11.2,-8.8) N1(0,-9.6) N2(0.8,-9.6) N3(1.6,-9.6) N4(2.4,-9.6) N5(3.2,-9.6) N6(4,-9.6) N7(4.8,-9.6) N8(5.6,-9.6) N9(6.4,-9.6) N10(7.2,-9.6) N11(8,-9.6) N12(8.8,-9.6) N13(9.6,-9.6) N14(10.4,-9.6) N15(11.2,-9.6) P1(0,-10.4) P2(0.8,-10.4) P3(1.6,-10.4) P4(2.4,-10.4) P5(3.2,-10.4) P6(4,-10.4) P7(4.8,-10.4) P8(5.6,-10.4) P9(6.4,-10.4) P10(7.2,-10.4) P11(8,-10.4) P12(8.8,-10.4) P13(9.6,-10.4) P14(10.4,-10.4) P15(11.2,-10.4) R1(0,-11.2) R2(0.8,-11.2) R3(1.6,-11.2) R4(2.4,-11.2) R5(3.2,-11.2) R6(4,-11.2) R7(4.8,-11.2) R8(5.6,-11.2) R9(6.4,-11.2) R10(7.2,-11.2) R11(8,-11.2) R12(8.8,-11.2) R13(9.6,-11.2) R14(10.4,-11.2) R15(11.2,-11.2)
  silkscreen extent -0.8,-12 12,0.8
Crystal_SMD_Cyl [mm]
  rect 2.5x6 smd: 0(0,6)
  rect 1x2.5 smd: 1(-1.27,0) 2(1.27,0)
  silkscreen extent -1.8,-1.2 1.8,9
CSM-7 [mm] "Quartz Crystal, SM; 2 Leads; Body 11.4 x 4.8 x 5 mm (LxWxH)"
  rect 4.5x1.5 smd: 1(-4.25,0) 2(4.25,0)
  silkscreen extent -5.75,-2.5 5.75,2.5
D [mm] "Capacitor, SM Tantalum; Body 7.3 x 4.3 mm (LxW typ)"
  rect 2.6x2.4 smd: 1(-3.2,0) 2(3.2,0)
  silkscreen extent -4.57,-2.3 3.8,2.43
FX8-120P [mm]
  round 0.7 hole 0.8: 0(1.5,-37.8)
  round 1.1 hole 1.1: 0(1.5,2.4)
  oval 1.6x0.35 smd: 1(0,0)
  rect 1.6x0.35 smd: 2(0,-0.6) 3(0,-1.2) 4(0,-1.8) 5(0,-2.4) 6(0,-3) 7(0,-3.6) 8(0,-4.2) 9(0,-4.8) 10(0,-5.4) 11(0,-6) 12(0,-6.6) 13(0,-7.2) 14(0,-7.8) 15(0,-8.4) 16(0,-9) 17(0,-9.6) 18(0,-10.2) 19(0,-10.8) 20(0,-11.4) 21(0,-12) 22(0,-12.6) 23(0,-13.2) 24(0,-13.8) 25(0,-14.4) 26(0,-15) 27(0,-15.6) 28(0,-16.2) 29(0,-16.8) 30(0,-17.4) 31(0,-18) 32(0,-18.6) 33(0,-19.2) 34(0,-19.8) 35(0,-20.4) 36(0,-21) 37(0,-21.6) 38(0,-22.2) 39(0,-22.8) 40(0,-23.4) 41(0,-24) 42(0,-24.6) 43(0,-25.2) 44(0,-25.8) 45(0,-26.4) 46(0,-27) 47(0,-27.6) 48(0,-28.2) 49(0,-28.8) 50(0,-29.4) 51(0,-30) 52(0,-30.6) 53(0,-31.2) 54(0,-31.8) 55(0,-32.4) 56(0,-33) 57(0,-33.6) 58(0,-34.2) 59(0,-34.8) 60(0,-35.4) 61(5.8,-35.4) 62(5.8,-34.8) 63(5.8,-34.2) 64(5.8,-33.6) 65(5.8,-33) 66(5.8,-32.4) 67(5.8,-31.8) 68(5.8,-31.2) 69(5.8,-30.6) 70(5.8,-30) 71(5.8,-29.4) 72(5.8,-28.8) 73(5.8,-28.2) 74(5.8,-27.6) 75(5.8,-27) 76(5.8,-26.4) 77(5.8,-25.8) 78(5.8,-25.2) 79(5.8,-24.6) 80(5.8,-24) 81(5.8,-23.4) 82(5.8,-22.8) 83(5.8,-22.2) 84(5.8,-21.6) 85(5.8,-21) 86(5.8,-20.4) 87(5.8,-19.8) 88(5.8,-19.2) 89(5.8,-18.6) 90(5.8,-18) 91(5.8,-17.4) 92(5.8,-16.8) 93(5.8,-16.2) 94(5.8,-15.6) 95(5.8,-15) 96(5.8,-14.4) 97(5.8,-13.8) 98(5.8,-13.2) 99(5.8,-12.6) 100(5.8,-12) 101(5.8,-11.4) 102(5.8,-10.8) 103(5.8,-10.2) 104(5.8,-9.6) 105(5.8,-9) 106(5.8,-8.4) 107(5.8,-7.8) 108(5.8,-7.2) 109(5.8,-6.6) 110(5.8,-6) 111(5.8,-5.4) 112(5.8,-4.8) 113(5.8,-4.2) 114(5.8,-3.6) 115(5.8,-3) 116(5.8,-2.4) 117(5.8,-1.8) 118(5.8,-1.2) 119(5.8,-0.6) 120(5.8,0)
  silkscreen extent -0.03,-39 5.8,3.6
LQFP100 [mm] "QFP; 100 Leads; Body 14 x 14 mm; Pitch 0.5 mm"
  rect 1.6x0.3 smd: 1(-7.6,6) 2(-7.6,5.5) 3(-7.6,5) 4(-7.6,4.5) 5(-7.6,4) 6(-7.6,3.5) 7(-7.6,3) 8(-7.6,2.5) 9(-7.6,2) 10(-7.6,1.5) 11(-7.6,1) 12(-7.6,0.5) 13(-7.6,0) 14(-7.6,-0.5) 15(-7.6,-1) 16(-7.6,-1.5) 17(-7.6,-2) 18(-7.6,-2.5) 19(-7.6,-3) 20(-7.6,-3.5) 21(-7.6,-4) 22(-7.6,-4.5) 23(-7.6,-5) 24(-7.6,-5.5) 25(-7.6,-6) 51(7.6,-6) 52(7.6,-5.5) 53(7.6,-5) 54(7.6,-4.5) 55(7.6,-4) 56(7.6,-3.5) 57(7.6,-3) 58(7.6,-2.5) 59(7.6,-2) 60(7.6,-1.5) 61(7.6,-1) 62(7.6,-0.5) 63(7.6,0) 64(7.6,0.5) 65(7.6,1) 66(7.6,1.5) 67(7.6,2) 68(7.6,2.5) 69(7.6,3) 70(7.6,3.5) 71(7.6,4) 72(7.6,4.5) 73(7.6,5) 74(7.6,5.5) 75(7.6,6)
  rect 0.3x1.6 smd: 26(-6,-7.6) 27(-5.5,-7.6) 28(-5,-7.6) 29(-4.5,-7.6) 30(-4,-7.6) 31(-3.5,-7.6) 32(-3,-7.6) 33(-2.5,-7.6) 34(-2,-7.6) 35(-1.5,-7.6) 36(-1,-7.6) 37(-0.5,-7.6) 38(0,-7.6) 39(0.5,-7.6) 40(1,-7.6) 41(1.5,-7.6) 42(2,-7.6) 43(2.5,-7.6) 44(3,-7.6) 45(3.5,-7.6) 46(4,-7.6) 47(4.5,-7.6) 48(5,-7.6) 49(5.5,-7.6) 50(6,-7.6) 76(6,7.6) 77(5.5,7.6) 78(5,7.6) 79(4.5,7.6) 80(4,7.6) 81(3.5,7.6) 82(3,7.6) 83(2.5,7.6) 84(2,7.6) 85(1.5,7.6) 86(1,7.6) 87(0.5,7.6) 88(0,7.6) 89(-0.5,7.6) 90(-1,7.6) 91(-1.5,7.6) 92(-2,7.6) 93(-2.5,7.6) 94(-3,7.6) 95(-3.5,7.6) 96(-4,7.6) 97(-4.5,7.6) 98(-5,7.6) 99(-5.5,7.6) 100(-6,7.6)
  silkscreen extent -7.72,-6.4 6.4,6.83
MSOP8 [mm] "Shrink Small Outline; 8 Leads; Body Width 3 mm; Pitch 0.65 mm"
  rect 0.4x1.55 smd: 1(-0.975,-2.075) 2(-0.325,-2.075) 3(0.325,-2.075) 4(0.975,-2.075) 5(0.975,2.075) 6(0.325,2.075) 7(-0.325,2.075) 8(-0.975,2.075)
  silkscreen extent -1.85,-2.2 1.55,0.9
QSOP16 [mm] "SSOP; 16 Leads; Body Width 3.9 mm; Pitch 0.635 mm"
  rect 0.4x2.2 smd: 1(-2.222,-2.6) 2(-1.587,-2.6) 3(-0.953,-2.6) 4(-0.318,-2.6) 5(0.318,-2.6) 6(0.953,-2.6) 7(1.587,-2.6) 8(2.222,-2.6) 9(2.222,2.6) 10(1.587,2.6) 11(0.953,2.6) 12(0.318,2.6) 13(-0.318,2.6) 14(-0.953,2.6) 15(-1.587,2.6) 16(-2.222,2.6)
  silkscreen extent -3.1,-2.72 2.5,1.1
SC70-5 [mm] "SOT-353/SC-88A; 5 Leads; Body 2.2 x 2.4 mm, inc. leads (LxW max)"
  rect 0.35x1.15 smd: 1(-0.65,-0.875) 2(0,-0.875) 3(0.65,-0.875) 4(0.65,0.875) 5(-0.65,0.875)
  silkscreen extent -1.27,-1.92 1.15,0.7
Self_1812 [mm]
  rect 3.5x3.2 smd: 1(-2.35,0) 2(2.15,0)
  silkscreen extent -4.1,-1.6 3.9,1.6
SOT23-3 [mm] "SOT-23; 3 Leads; Body 3.0 x 2.5 mm, inc. leads (LxW max)"
  rect 0.95x1 smd: 1(-0.95,-1.125) 2(0.95,-1.125) 3(0,1.125)
  silkscreen extent -2.1,-1.25 1.32,1.13
SOT23-5 [mm] "SOT-23/SC-74A; 5 Leads; Body 3 x 3 mm, inc. leads (LxW max)"
  rect 0.55x1.45 smd: 1(-0.95,-1.075) 2(0,-1.075) 3(0.95,-1.075) 4(0.95,1.075) 5(-0.95,1.075)
  silkscreen extent -1.67,-2.23 1.55,0.9
SOT223 [mm] "SOT-223/SC-73; 4 Leads; Body 6.7 x 7.3 mm, inc. leads (LxW max)"
  rect 1.1x1.95 smd: 1(-2.3,-3.2) 2(0,-3.2) 3(2.3,-3.2)
  rect 3.4x1.95 smd: 4(0,3.2)
  silkscreen extent -3.35,-4.85 3.35,1.83
TQ144 [mm] "144-Pin Thin Quad Flat Pack (TQ144)"
  rect 1.6x0.3 smd: 1(-10.6,8.75) 2(-10.6,8.25) 3(-10.6,7.75) 4(-10.6,7.25) 5(-10.6,6.75) 6(-10.6,6.25) 7(-10.6,5.75) 8(-10.6,5.25) 9(-10.6,4.75) 10(-10.6,4.25) 11(-10.6,3.75) 12(-10.6,3.25) 13(-10.6,2.75) 14(-10.6,2.25) 15(-10.6,1.75) 16(-10.6,1.25) 17(-10.6,0.75) 18(-10.6,0.25) 19(-10.6,-0.25) 20(-10.6,-0.75) 21(-10.6,-1.25) 22(-10.6,-1.75) 23(-10.6,-2.25) 24(-10.6,-2.75) 25(-10.6,-3.25) 26(-10.6,-3.75) 27(-10.6,-4.25) 28(-10.6,-4.75) 29(-10.6,-5.25) 30(-10.6,-5.75) 31(-10.6,-6.25) 32(-10.6,-6.75) 33(-10.6,-7.25) 34(-10.6,-7.75) 35(-10.6,-8.25) 36(-10.6,-8.75) 73(10.6,-8.75) 74(10.6,-8.25) 75(10.6,-7.75) 76(10.6,-7.25) 77(10.6,-6.75) 78(10.6,-6.25) 79(10.6,-5.75) 80(10.6,-5.25) 81(10.6,-4.75) 82(10.6,-4.25) 83(10.6,-3.75) 84(10.6,-3.25) 85(10.6,-2.75) 86(10.6,-2.25) 87(10.6,-1.75) 88(10.6,-1.25) 89(10.6,-0.75) 90(10.6,-0.25) 91(10.6,0.25) 92(10.6,0.75) 93(10.6,1.25) 94(10.6,1.75) 95(10.6,2.25) 96(10.6,2.75) 97(10.6,3.25) 98(10.6,3.75) 99(10.6,4.25) 100(10.6,4.75) 101(10.6,5.25) 102(10.6,5.75) 103(10.6,6.25) 104(10.6,6.75) 105(10.6,7.25) 106(10.6,7.75) 107(10.6,8.25) 108(10.6,8.75)
  rect 0.3x1.6 smd: 37(-8.75,-10.6) 38(-8.25,-10.6) 39(-7.75,-10.6) 40(-7.25,-10.6) 41(-6.75,-10.6) 42(-6.25,-10.6) 43(-5.75,-10.6) 44(-5.25,-10.6) 45(-4.75,-10.6) 46(-4.25,-10.6) 47(-3.75,-10.6) 48(-3.25,-10.6) 49(-2.75,-10.6) 50(-2.25,-10.6) 51(-1.75,-10.6) 52(-1.25,-10.6) 53(-0.75,-10.6) 54(-0.25,-10.6) 55(0.25,-10.6) 56(0.75,-10.6) 57(1.25,-10.6) 58(1.75,-10.6) 59(2.25,-10.6) 60(2.75,-10.6) 61(3.25,-10.6) 62(3.75,-10.6) 63(4.25,-10.6) 64(4.75,-10.6) 65(5.25,-10.6) 66(5.75,-10.6) 67(6.25,-10.6) 68(6.75,-10.6) 69(7.25,-10.6) 70(7.75,-10.6) 71(8.25,-10.6) 72(8.75,-10.6) 109(8.75,10.6) 110(8.25,10.6) 111(7.75,10.6) 112(7.25,10.6) 113(6.75,10.6) 114(6.25,10.6) 115(5.75,10.6) 116(5.25,10.6) 117(4.75,10.6) 118(4.25,10.6) 119(3.75,10.6) 120(3.25,10.6) 121(2.75,10.6) 122(2.25,10.6) 123(1.75,10.6) 124(1.25,10.6) 125(0.75,10.6) 126(0.25,10.6) 127(-0.25,10.6) 128(-0.75,10.6) 129(-1.25,10.6) 130(-1.75,10.6) 131(-2.25,10.6) 132(-2.75,10.6) 133(-3.25,10.6) 134(-3.75,10.6) 135(-4.25,10.6) 136(-4.75,10.6) 137(-5.25,10.6) 138(-5.75,10.6) 139(-6.25,10.6) 140(-6.75,10.6) 141(-7.25,10.6) 142(-7.75,10.6) 143(-8.25,10.6) 144(-8.75,10.6)
  silkscreen extent -10.73,-9.4 9.4,9.57
TSOP56 [mm] "Shrink Small Outline, Plastic, Thin; 56 Leads; Body Width 18.4 mm; Pitch 0.5 mm"
  rect 0.3x1.6 smd: 1(-6.75,-9.6) 2(-6.25,-9.6) 3(-5.75,-9.6) 4(-5.25,-9.6) 5(-4.75,-9.6) 6(-4.25,-9.6) 7(-3.75,-9.6) 8(-3.25,-9.6) 9(-2.75,-9.6) 10(-2.25,-9.6) 11(-1.75,-9.6) 12(-1.25,-9.6) 13(-0.75,-9.6) 14(-0.25,-9.6) 15(0.25,-9.6) 16(0.75,-9.6) 17(1.25,-9.6) 18(1.75,-9.6) 19(2.25,-9.6) 20(2.75,-9.6) 21(3.25,-9.6) 22(3.75,-9.6) 23(4.25,-9.6) 24(4.75,-9.6) 25(5.25,-9.6) 26(5.75,-9.6) 27(6.25,-9.6) 28(6.75,-9.6) 29(6.75,9.6) 30(6.25,9.6) 31(5.75,9.6) 32(5.25,9.6) 33(4.75,9.6) 34(4.25,9.6) 35(3.75,9.6) 36(3.25,9.6) 37(2.75,9.6) 38(2.25,9.6) 39(1.75,9.6) 40(1.25,9.6) 41(0.75,9.6) 42(0.25,9.6) 43(-0.25,9.6) 44(-0.75,9.6) 45(-1.25,9.6) 46(-1.75,9.6) 47(-2.25,9.6) 48(-2.75,9.6) 49(-3.25,9.6) 50(-3.75,9.6) 51(-4.25,9.6) 52(-4.75,9.6) 53(-5.25,9.6) 54(-5.75,9.6) 55(-6.25,9.6) 56(-6.75,9.6)
  silkscreen extent -7.57,-9.72 7.05,8.4
TSOP86-400 [mm]
  oval 1x0.3 smd: 1(0,0)
  rect 1x0.3 smd: 2(0,-0.5) 3(0,-1) 4(0,-1.5) 5(0,-2) 6(0,-2.5) 7(0,-3) 8(0,-3.5) 9(0,-4) 10(0,-4.5) 11(0,-5) 12(0,-5.5) 13(0,-6) 14(0,-6.5) 15(0,-7) 16(0,-7.5) 17(0,-8) 18(0,-8.5) 19(0,-9) 20(0,-9.5) 21(0,-10) 22(0,-10.5) 23(0,-11) 24(0,-11.5) 25(0,-12) 26(0,-12.5) 27(0,-13) 28(0,-13.5) 29(0,-14) 30(0,-14.5) 31(0,-15) 32(0,-15.5) 33(0,-16) 34(0,-16.5) 35(0,-17) 36(0,-17.5) 37(0,-18) 38(0,-18.5) 39(0,-19) 40(0,-19.5) 41(0,-20) 42(0,-20.5) 43(0,-21) 44(10.96,-21) 45(10.96,-20.5) 46(10.96,-20) 47(10.96,-19.5) 48(10.96,-19) 49(10.96,-18.5) 50(10.96,-18) 51(10.96,-17.5) 52(10.96,-17) 53(10.96,-16.5) 54(10.96,-16) 55(10.96,-15.5) 56(10.96,-15) 57(10.96,-14.5) 58(10.96,-14) 59(10.96,-13.5) 60(10.96,-13) 61(10.96,-12.5) 62(10.96,-12) 63(10.96,-11.5) 64(10.96,-11) 65(10.96,-10.5) 66(10.96,-10) 67(10.96,-9.5) 68(10.96,-9) 69(10.96,-8.5) 70(10.96,-8) 71(10.96,-7.5) 72(10.96,-7) 73(10.96,-6.5) 74(10.96,-6) 75(10.96,-5.5) 76(10.96,-5) 77(10.96,-4.5) 78(10.96,-4) 79(10.96,-3.5) 80(10.96,-3) 81(10.96,-2.5) 82(10.96,-2) 83(10.96,-1.5) 84(10.96,-1) 85(10.96,-0.5) 86(10.96,0)
  silkscreen extent 1.31,-21.25 9.63,0.38
TSSOP16 [mm] "Shrink Small Outline; 16 Leads; Body Width 4.4 mm; Pitch 0.65 mm"
  rect 0.3x1.65 smd: 1(-2.275,-2.775) 2(-1.625,-2.775) 3(-0.975,-2.775) 4(-0.325,-2.775) 5(0.325,-2.775) 6(0.975,-2.775) 7(1.625,-2.775) 8(2.275,-2.775) 9(2.275,2.775) 10(1.625,2.775) 11(0.975,2.775) 12(0.325,2.775) 13(-0.325,2.775) 14(-0.975,2.775) 15(-1.625,2.775) 16(-2.275,2.775)
  silkscreen extent -3.1,-2.9 2.55,1.55
UMAX8 [mm] "Shrink Small Outline; 8 Leads; Body Width 3 mm; Pitch 0.65 mm"
  rect 0.35x1.5 smd: 1(-0.975,-2.075) 2(-0.325,-2.075) 3(0.325,-2.075) 4(0.975,-2.075) 5(0.975,2.075) 6(0.325,2.075) 7(-0.325,2.075) 8(-0.975,2.075)
  silkscreen extent -1.82,-2.2 1.52,0.92

## Part data
C1 C2 C3 C4 C5 C6 C7 C8 C9 C10 C11 C12 C13 C14 C15 C16 C17 C18 C19 C20 C21 C22 C23 C25 C27 C28 C29 C30 C31 C32 C33 C34 C35 C36 C37 C38 C39 C40 C41 C43 C44 C46 C47 C48 C49 C50 C51 C52 C53 C54 C55 C56 C57 C58 C59 C60 C61 C62 C63 C64 C65 C66 C67 C68 C69 C70 C71 C73 C74 C76 C77 C78 C79 C80 C81 C82 C83 C84 C85 C86 C87 C88 C89 C90 C91 C92 C93 C94 C95: library part Cap
C24 C26 C72 C75: library part Cap, "Ceramic Capacitor"
C42: library part Cap, "Cermaic Capacitor"
C45: library part T491D, "Solid Tantalum Chip Capacitor, Standard T491 Series - Industrial Grade"
L1 L2 L3: library part Self
Q1 Q2: library part QUARTZ
R1 R2 R3 R4 R5 R6 R7 R8 R9 R10 R11 R12 R13 R14 R15 R16 R17 R18 R19 R20 R21 R22 R23 R27 R28 R29 R30 R31 R32 R33 R34 R35 R36 R37 R38 R39 R40 R41 R42 R43 R44 R45 R46: library part Res
U1: library part MC9328MXL
U4: "±15kV ESD-Protected, 1µA, 3.0V/5.5V, 250kbps, RS-232 Transceiver with AutoShutdown"
U7: library part FM1233
U11: library part DM9000
U13: "Spartan-3 1.2V FPGA, 97 User I/Os, 144-pin TQFP, High Performance, Commercial Grade"
U15: library part FAN2505

## Via types
v1: diameter 0.3, hole 0.2, Top Layer to MidLayer2, 182 vias
v2: diameter 0.3, hole 0.2, Top Layer to Bottom Layer, 180 vias
v3: diameter 0.3, hole 0.2, MidLayer2 to Bottom Layer, 120 vias
v4: diameter 0.3, hole 0.2, MidLayer4 to Bottom Layer, 73 vias
v5: diameter 0.3, hole 0.2, Top Layer to MidLayer4, 49 vias
v6: diameter 0.3, hole 0.2, Top Layer to MidLayer3, 34 vias
v7: diameter 0.4, hole 0.2, Top Layer to MidLayer4, 15 vias
v8: diameter 0.3, hole 0.2, Top Layer to MidLayer1, 6 vias
v9: diameter 0.3, hole 0.2, MidLayer2 to MidLayer4, 2 vias

## Nets (pads, with @x,y where several pads share a name; then routed paths per layer and width w, separated by ;. In a path a pad name is that pad's centre, name@x,y a point inside that pad or via, vN(x,y) a via of type N, cw(c..) or ccw(c..) an arc to the next point about the centre after c; other vN are vias at no path point)
+1V2: C62.2 C63.2 C64.2 C65.2 C74.2 C75.2 C92.2 C93.2 C94.2 C95.2 R43.2 U13.49 U13.61 U13.121 U13.133 U14.2 U14.4 | length 13.4
  Top Layer w0.15: U13.61@33.45,51.1 33.45,52.35 34.9,53.8 C64.2@35,53.8 ; U13.121@33.95,29.9 33.95,28.15 C63.2@34,28.1 v2(35.7,28.1) ; v2(38.3,27.6) 38.8,28.1 C92.2@39.9,28.1 39.95,28.15 U13.133@39.95,29.9 ; C95.2@38.6,52.9 C65.2@39.6,52.9 39.45,52.75 U13.49@39.45,51.1
+1V8: C1.2 C2.2 C25.2 C26.2 L1.2 U1.D7 U1.F11 U1.J8 U1.M13 | length 7.9
  Top Layer w0.15: L1.2@75.32,29.111 L1.2@76.32,28.111
  Top Layer w0.5: L1.2@76.32,28.111 75.17,29.261 75.17,31.211 75.493,30.888 76.973,30.888 76.97,30.891 C25.2@76.97,31.811
+2V5: C58.2 C59.2 C60.2 C61.2 C66.2 C71.2 C73.2 C88.2 C89.2 C90.2 C91.2 R38.1 R39.2 R42.2 U13.48 U13.62 U13.120 U13.134 U14.3 U15.2 U15.4 | length 13.7
  Top Layer w0.15: C90.2@31.901,52.9 C60.2@32.9,52.9 ; C59.2@32,28.1 C89.2@32.999,28.1 ; v2(32.5,27.6) 32.5,28.1 ; C60.2@32.9,52.9 32.95,52.85 U13.62@32.95,51.1 ; C89.2@32.999,28.1 33.45,28.551 U13.120@33.45,29.9 ; U13.48@39.95,51.1 39.95,52.25 C91.2@40.6,52.9 C61.2@41.6,52.9 ; U13.134@40.45,29.9 40.45,28.55 C58.2@40.9,28.1 C88.2@41.9,28.1 42.3,27.7 v2(42.5,27.7) ; v2(45.3,26.6) R38.1@45.3,27.2
+3V3: C3.2 C4.2 C5.2 C6.2 C9.2 C10.2 C11.2 C12.2 C13.2 C14.2 C19.1 C20.1 C22.1 C23.1 C24.2 C28.2 C29.2 C30.2 C31.2 C32.1 C33.1 C34.1 C35.1 C36.1 C37.1 C40.1 C42.2 C46.2 C47.2 C48.2 C49.2 C50.2 C51.2 C52.2 C53.2 C54.2 C55.2 C56.2 C57.2 C67.2 C68.2 C69.2 C70.2 C72.2 C76.2 C77.2 C78.2 C79.2 C80.2 C81.2 C82.2 C83.2 C84.2 C85.2 C86.2 C87.2 L2.1 R1.2 R6.2 R7.2 R10.1 R17.2 R18.2 R19.2 R20.2 R27.2 R30.2 R31.2 R37.2 U1.C15 U1.D5 U1.D9 U1.E5 U1.F5 U1.F6 U1.G5 U1.G7 U1.H10 U1.J5 U1.K5 U1.K8 U1.L5 U1.L6 U1.M6 U1.R15 U2.1 U2.3 U2.9 U2.15 U2.29 U2.35 U2.41 U2.43 U2.49 U2.55 U2.75 U2.81 U3.9 U3.37 U3.43 U4.15 U4.16 U5.9 U5.10 U5.15 U5.16 U6.5 U7.3 U8.1 U8.3 U9.11 U10.1 U11.5 U11.16 U11.17 U11.20 U11.36 U11.55 U11.72 U11.73 U11.90 U12.8 U13.3 U13.19 U13.34 U13.43 U13.54 U13.66 U13.75 U13.91 U13.106 U13.115 U13.126 U13.138 U15.3 X2.57 X2.58 X2.63 X2.64 | length 75.2
  Top Layer w0.15: v2(19.99,39.167) 20.633,39.167 C32.1@20.7,39.1 ; v8(23.6,33.3) 24.1,33.3 ; v8(23.8,48) 24.3,48 ; v8(23.9,40.8) 24.4,40.8 ; C51.2@24.1,33.8 C81.2@24.1,32.801 24.151,32.75 U13.106@26.1,32.75 ; C83.2@24.3,47.5 C53.2@24.3,48.5 24.55,48.25 U13.75@26.1,48.25 ; C82.2@24.4,40.301 24.451,40.25 U13.91@26.1,40.25 ; C82.2@24.4,40.301 C52.2@24.4,41.3 ; v2(29.3,27.6) 29.8,28.1 C80.2@31,28.1 30.95,28.15 U13.115@30.95,29.9 ; C84.2@29.9,53 C54.2@30.9,53 30.95,52.95 U13.66@30.95,51.1 ; 30.4,53 v8(30.4,53.5) ; U13.126@36.45,29.9 36.45,28.151 C49.2@36.501,28.1 C79.2@37.5,28.1 ; C85.2@36.5,52.9 C55.2@37.6,52.9 ; U13.54@36.95,51.1 36.95,52.85 36.9,52.9 36.9,53.3 v8(37,53.4) ; v2(37,27.6) 37,28.1 ; C29.2@37.7,59.8 C31.2@38.6,59.8 38.6,57.768 39.643,56.725 U10.1@40.375,56.725 ; U13.138@42.45,29.9 42.45,28.65 42.9,28.2 C78.2@44.3,28.2 ; U13.43@42.45,51.1 42.45,52.949 C86.2@42.601,53.1 C56.2@43.6,53.1 ; 43.1,53.1 v8(43.1,53.6) ; v2(43.8,27.7) 43.8,28.2 ; U13.3@47.3,32.75 49.05,32.75 C77.2@49.2,32.9 C47.2@49.2,31.9 ; U13.19@47.3,40.75 49.25,40.75 C76.2@49.3,40.7 C46.2@49.3,39.599 ; U13.34@47.3,48.25 49.249,48.25 C87.2@49.3,48.199 C57.2@49.3,47.2 ; U3.37@55.925,32.4 55.925,31.075 C9.2@56,31 ; U3.9@61.425,51.6 61.425,53.025 C10.2@61.5,53.1 ; v2(71.095,45.009) 71.095,45.005 U1.K5@71.5,44.6 ; C19.1@78.2,38.3 78.635,38.735 v2(78.791,38.735) ; U1.R15@79.5,40.6 79.9,40.2
  Top Layer w0.5: U8.1@81.745,30.861 83.82,30.861 C24.2@83.87,30.911 ; U8.3@81.745,32.761 82.745,32.761 82.945,32.561 82.945,30.949
  Bottom Layer w0.15: U11.36@18.7,38.7 19.548,38.7 v2@19.99,39.141 ; v2(29.3,27.6) 29.8,28.1 30,28.1 ; U11.90@33.9,38.7 35.4,38.7 C33.1@35.6,38.5 ; C28.2@41.6,41.3 C30.2@42.6,41.3 ; C30.2@42.653,41.475 U9.11@42.653,43.1 ; C11.2@48,48.1 48.2,47.9 U2.49@48.2,46.76 ; C14.2@49.5,34.7 49.7,34.9 U2.35@49.7,35.8 ; C12.2@62.7,34.6 U2.9@62.7,35.8 ; U2.81@64.2,46.76 64.2,47.5 C13.2@64.5,47.8 ; C3.2@70.889,44.989 71.075,44.989 v2(71.095,45.009) ; U4.15@77.725,38.725 78.781,38.725 v2(78.791,38.735) ; C22.1@80.9,52.6 81.05,52.75 U6.5@82.125,52.75
  Bottom Layer w0.3: U5.15@74.675,35.475 U5.16@74.675,34.825 75.1,34.4 C20.1@75.1,33.8 ; U5.10@74.675,38.725 U5.9@74.675,39.375 ; U4.15@77.725,38.725 U4.16@77.725,39.375 U4.16@77.975,39.375 ; U7.3@82.9,46.325 C23.1@82.9,47.5
A0: U1.R7 U13.21 X1.35 | length 45.1
  Top Layer w0.15: U13.21@47.3,41.75 48.35,41.75 v1(48.4,41.8) ; v1(72.7,40.2) U1.R7@73.1,40.6
  MidLayer2 w0.15: v3(51.384,51.105) 49.936,49.657 48.514,49.657 47.904,49.047 47.904,42.037 48.141,41.8 v1(48.4,41.8) 48.4,38.646 49.657,37.389 61.451,37.389 61.908,37.846 63.703,37.846 64.084,37.465 70.79,37.465 72.7,39.375 v1(72.7,40.2)
  Bottom Layer w0.15: v3(51.384,51.105) 51.4,51.121 X1.35@51.4,52.6
A1: U1.P6 U3.28 U13.23 X1.86 | length 46.7
  Top Layer w0.15: U13.23@47.3,42.75 49.278,42.75 51.925,45.397 51.925,55.263 v2(51.892,55.296) ; U3.28@51.9,51.575 U3.28@51.925,51.6 ; v1(71.9,41) U1.P6@72.3,41.4
  MidLayer2 w0.15: v1(48.75,42.75) 53.252,38.248 60.803,38.248 61.544,38.989 63.639,38.989 63.728,38.9 64.3,38.9 64.9,38.3 69.378,38.3 70.278,39.2 70.8,39.2 71.5,39.9 71.5,40.6 v1(71.9,41)
  Bottom Layer w0.15: X1.86@51.4,58.4 51.4,55.788 v2(51.892,55.296)
A2: U1.P5 U2.25 U3.27 U13.24 X1.34 | length 49.9
  Top Layer w0.15: U13.24@47.3,43.25 v1(48.85,43.25) ; v1(52.419,40.281) 52.4,40.3 52.4,51.575 U3.27@52.425,51.6 ; v1(71.1,41) U1.P5@71.5,41.4
  MidLayer2 w0.15: v1@48.9,43.3 49.4,43.3 v1(52.419,40.281) 52.764,39.936 53.902,38.798 60.575,38.798 61.477,39.7 64.6,39.7 65.4,38.9 69.2,38.9 70.1,39.8 70.5,39.8 70.7,40 70.7,40.6 v1(71.1,41)
  Bottom Layer w0.15: X1.34@52,52.6 52,50.6 52.3,50.3 v2(52.4,50.3) ; v1(52.419,40.281) 52.419,40.735 52.934,41.25 53.95,41.25 54.475,40.724 54.475,39.48 54.7,39.255 U2.25@54.7,35.8
A3: U1.P4 U2.26 U3.26 U13.25 X1.87 | length 52
  Top Layer w0.15: U13.25@47.3,43.75 v1(48.95,43.75) ; v2(52,57.1) 52.3,56.8 52.3,53.3 52.925,52.675 52.925,40.425 v2(52.9,40.4) ; U3.26@52.9,51.575 U3.26@52.925,51.6 ; v1(70.3,41) U1.P4@70.7,41.4
  MidLayer2 w0.15: v1(48.95,43.75) 49.55,43.75 54.227,39.073 60.461,39.073 61.539,40.15 65.35,40.15 65.498,40.002 66,39.5 69,39.5 69.9,40.4 69.9,40.6 70.129,40.829 v1(70.3,41)
  Bottom Layer w0.15: v2(52,57.1) X1.87@52,58.4 ; v2(52.9,40.4) 52.9,40.733 53.137,40.97 53.721,40.97 54.2,40.491 U2.26@54.2,35.8
A4: U1.P3 U2.27 U3.25 U13.26 X1.33 | length 45.2
  Top Layer w0.15: U13.26@47.3,44.25 v1(48.95,44.25) ; v2(53.4,40.6) 53.4,41.075 53.425,41.1 v2@53.425,50.3 ; v2(53.4,50.3) 53.4,50.675 53.425,50.7 U3.25@53.425,51.6 U3.25@53.4,51.575 ; v1(69.5,41) U1.P3@69.9,41.4
  MidLayer2 w0.15: v1(48.95,44.25) 49.75,44.25 54.652,39.348 60.348,39.348 61.425,40.425 65.475,40.425 66.1,39.8 68.9,39.8 69.1,40 69.1,40.6 v1(69.5,41)
  Bottom Layer w0.15: X1.33@52.6,52.6 52.6,50.7 53,50.3 v2(53.4,50.3) ; v2(53.4,40.6) 53.7,40.3 U2.27@53.7,35.8
A5: U1.P2 U2.60 U3.24 U13.27 X1.88 | length 43.9
  Top Layer w0.15: U13.27@47.3,44.75 v1(50.673,44.75) ; v2(52.6,57.1) 52.6,53.8 53.925,52.475 v2@53.925,49.525 ; v2(53.9,49.5) 53.9,42.184 v1(53.923,42.161) ; U3.24@53.9,51.575 U3.24@53.925,51.6 ; v1(68.7,41) U1.P2@69.1,41.4
  MidLayer2 w0.15: v1(50.673,44.75) 51.338,44.75 53.927,42.161 v1(53.923,42.161) 54.584,41.5 54.588,41.5 54.737,41.351 ; 54.759,41.351 55.572,40.538 60.02,40.538 60.982,41.5 65.7,41.5 66.2,41 v1(68.7,41)
  Bottom Layer w0.15: v2(52.6,57.1) X1.88@52.6,58.4 ; U2.60@53.7,46.76 53.7,49.3 v2(53.9,49.5)
A6: U1.R1 U2.61 U3.23 U13.28 X1.32 | length 41.2
  Top Layer w0.15: U13.28@47.3,45.25 v1(49.25,45.25) ; v1@54.425,41.125 54.425,49.74 v2(54.356,49.809) 54.356,50.579 54.425,50.648 U3.23@54.425,51.6 ; v1(67.7,40.6) U1.R1@68.3,40.6
  MidLayer2 w0.15: v1(49.25,45.25) 49.619,45.25 53.769,41.1 53.848,41.1 54.765,40.183 60.198,40.183 61.24,41.225 65.475,41.225 66.1,40.6 v1(67.7,40.6) ; 54.4,40.576 v1(54.4,41.1)
  Bottom Layer w0.15: X1.32@53.2,52.6 53.2,51 v2@54.373,49.827 ; U2.61@54.2,46.76 54.2,49.32 54.4,49.52 v2@54.4,49.8
A7: U1.N2 U2.62 U3.22 U13.30 X1.89 | length 43.9
  Top Layer w0.15: U13.30@47.3,46.25 v1(48.65,46.25) ; v2(53.2,57.1) 53.2,54.2 54.925,52.475 v2@54.925,49.225 ; v1(54.9,42.2) v2(54.9,49.2) ; U3.22@54.9,51.575 U3.22@54.925,51.6 ; v1(68.7,41.8) U1.N2@69.1,42.2
  MidLayer2 w0.15: v1(48.65,46.25) 49.35,46.25 50.85,46.25 55.495,41.605 59.969,41.605 60.706,42.342 63.163,42.342 63.253,42.251 65.849,42.251 66.3,41.8 v1(68.7,41.8)
  Bottom Layer w0.15: v2(53.2,57.1) X1.89@53.2,58.4 ; U2.62@54.7,46.76 54.7,49 v2(54.9,49.2)
A8: U1.N1 U2.63 U3.20 U13.31 X1.31 | length 40
  Top Layer w0.15: U13.31@47.3,46.75 v1(48.65,46.75) ; v1(55.321,42.342) 55.448,42.469 55.448,48.648 v2(55.9,49.1) ; v2@55.925,49.125 U3.20@55.925,51.6 ; v1(67.8,42.2) U1.N1@68.3,42.2
  MidLayer2 w0.15: v1(48.65,46.75) 50.894,46.75 55.633,42.012 59.635,42.012 60.321,42.697 63.196,42.697 63.293,42.6 65.9,42.6 66.112,42.388 66.3,42.2 v1(67.8,42.2)
  Bottom Layer w0.15: X1.31@53.8,52.6 53.8,50.9 55.6,49.1 ; U2.63@55.2,46.76 55.2,48.7 55.6,49.1 ; v2(55.9,49.1) 55.6,49.1
A9: U1.L2 U2.64 U3.19 U13.32 X1.90 | length 42.1
  Top Layer w0.15: U13.32@47.3,47.25 48.25,47.25 v1(48.4,47.1) ; v2(53.8,57.1) 53.8,55.1 56.4,52.5 56.4,51.575 U3.19@56.425,51.6 56.425,49.391 56.625,49.191 56.625,44.017 56.4,43.792 v1(56.4,43.4) ; v1(68.7,43.4) U1.L2@69.1,43.8
  MidLayer2 w0.15: v1(48.4,47.1) 50.933,47.1 54.633,43.4 62.831,43.4 63.17,43.739 63.805,43.739 64.144,43.4 v1(68.7,43.4)
  Bottom Layer w0.15: v2(53.8,57.1) X1.90@53.8,58.4 ; U2.64@55.7,46.76 55.7,45.976 56.21,45.466 v2(56.625,45.466)
A10: U1.L1 U2.65 U3.18 U13.33 X1.30 | length 38.4
  Top Layer w0.15: U13.33@47.3,47.75 48.25,47.75 48.4,47.6 v1(48.6,47.6) ; U3.18@56.925,51.6 56.925,50.5 56.9,50.475 v2(56.9,49.5) 57.125,49.275 v1(57.125,43.764) ; v1(67.7,43.8) U1.L1@68.3,43.8
  MidLayer2 w0.15: v1(48.6,47.6) 48.7,47.5 50,47.5 50.922,47.5 54.658,43.764 v1(57.125,43.764) ; v1@57.16,43.8 62.842,43.8 63.06,44.018 64.211,44.018 64.516,43.713 66.309,43.713 66.396,43.8 v1(67.7,43.8)
  Bottom Layer w0.15: X1.30@54.4,52.6 54.4,50.8 55.7,49.5 v2(56.9,49.5) ; U2.65@56.2,46.76 56.2,48.809 56.337,48.946 56.337,49.5
A11: U1.K2 U3.17 U13.35 X1.91 | length 39.9
  Top Layer w0.15: U13.35@47.3,48.75 v1(48.65,48.75) ; v2(54.3,57.1) 54.3,54.989 56.563,52.726 57.074,52.726 U3.17@57.425,52.375 ; 57.4,50.4 57.4,51.575 U3.17@57.425,51.6 57.425,44.806 v1(57.506,44.725) ; v1(68.7,44.2) U1.K2@69.1,44.6
  MidLayer2 w0.15: v1@48.7,48.8 50.011,48.8 54.086,44.725 58.78,44.725 59.309,44.196 60.752,44.196 61.112,44.556 66.954,44.556 67.31,44.2 v1(68.7,44.2)
  Bottom Layer w0.15: v2(54.3,57.1) 54.4,57.2 X1.91@54.4,58.4
A12: U1.J2 U3.13 U13.36 X1.29 | length 37
  Top Layer w0.15: U13.36@47.3,49.25 v1(48.65,49.25) ; v2(59.4,49.8) 59.4,51.575 U3.13@59.425,51.6 ; v1@59.425,45.025 v2@59.425,49.8 ; v1(68.7,45) U1.J2@69.1,45.4
  MidLayer2 w0.15: v1(48.65,49.25) 49.95,49.25 53.353,45.847 58.553,45.847 v1(59.4,45) 59.525,45.125 67.275,45.125 67.4,45 v1(68.7,45)
  Bottom Layer w0.15: X1.29@55,52.6 55,50.9 56,49.9 59.3,49.9 v2(59.4,49.8)
A13: R16.1 U1.K1 U3.12 X1.92 | length 27.2
  Top Layer w0.15: v2(55,57.1) 55,56.3 56.175,55.125 59.175,55.125 59.925,54.375 59.925,44.625 v1(59.9,44.6) ; 59.925,49.8 60.2,49.8 v2(60.3,49.7) ; v1(67.6,44.6) U1.K1@68.3,44.6
  MidLayer2 w0.15: v1(59.9,44.6) 60.131,44.831 67.071,44.831 67.302,44.6 v1(67.6,44.6)
  Bottom Layer w0.15: v2(55,57.1) X1.92@55,58.4 ; R16.1@60,49.2 60,49.4 v2(60.3,49.7)
A14: R15.1 U1.J1 U3.11 X1.28 | length 20.9
  Top Layer w0.15: v2(60.425,50.125) U3.11@60.425,51.6 ; v1(67.6,45.4) U1.J1@68.3,45.4
  MidLayer2 w0.15: v3(60.3,47.6) 60.3,46.177 61.077,45.4 v1(67.6,45.4)
  Bottom Layer w0.15: X1.28@55.6,52.6 55.6,51 56.4,50.2 60.35,50.2 60.833,49.717 60.833,48.793 R15.1@60.3,48.26 v3(60.3,47.6)
A15: U1.H1 U3.10 X1.93 | length 23.6
  Top Layer w0.15: v2(55.6,57.1) 55.6,56.2 56.4,55.4 59.5,55.4 60.925,53.975 60.925,46.225 v1(60.9,46.2) ; v1(67.5,46.2) U1.H1@68.3,46.2
  MidLayer2 w0.15: v1(60.9,46.2) v1(67.5,46.2)
  Bottom Layer w0.15: v2(55.6,57.1) X1.93@55.6,58.4
A16: U1.H2 U3.8 X1.27 | length 20.8
  Top Layer w0.15: v1(61.9,45.8) 61.9,47.219 62.052,47.371 62.052,50.248 v2(61.9,50.4) 61.9,50.775 61.925,50.8 U3.8@61.925,51.6 U3.8@61.9,51.575 ; v1(68.7,45.8) U1.H2@69.1,46.2
  MidLayer2 w0.15: v1(61.9,45.8) v1(68.7,45.8)
  Bottom Layer w0.15: X1.27@56.2,52.6 56.2,51.2 56.9,50.5 61.8,50.5 v2(61.9,50.4)
A17: R14.1 U1.G1 U3.7 X1.94 | length 26.3
  Top Layer w0.15: v2(56.2,57.1) 56.2,56.1 56.6,55.7 61.225,55.7 62.425,54.5 62.425,47.025 v1(62.4,47) ; v2(66.218,49.606) 66.218,48.717 67.175,47.76 67.175,47.425 v1(67.6,47) U1.G1@68.3,47
  MidLayer2 w0.15: v1(62.4,47) v1(67.6,47)
  Bottom Layer w0.15: v2(56.2,57.1) X1.94@56.2,58.4 ; R14.1@65.7,49.6 65.706,49.606 v2(66.218,49.606)
A18: R12.1 R13.1 U1.G2 U3.6 U11.92 X1.26 | length 63.2
  Top Layer w0.15: v2(62.9,50.3) 62.9,50.675 62.925,50.7 U3.6@62.925,51.6 ; v1@62.925,46.625 v2@62.925,50.3 ; v1(68.7,46.6) U1.G2@69.1,47
  MidLayer2 w0.15: v1(62.9,46.6) v1(68.7,46.6)
  MidLayer4 w0.15: v4(44.475,36.271) 44.658,36.453 44.658,39.12 45.491,39.954 45.491,45.237 45.771,45.517 45.771,46.787 44.399,48.158 44.399,49.809 45.06,50.47 48.006,50.47 50.089,52.553 55.448,52.553 v4(56.794,53.899)
  Bottom Layer w0.15: U11.92@33.9,37.7 38.373,37.7 39.751,36.322 44.425,36.322 v4(44.475,36.271) ; v4(56.794,53.899) 56.8,53.893 56.8,51.4 57.4,50.8 62.6,50.8 62.9,50.5 62.9,49 R12.1@62.6,48.7 R13.1@63.7,48.7
A19: R11.1 U1.F2 U3.5 X1.95 | length 23
  Top Layer w0.15: v2(56.7,57.1) 56.7,56.3 57,56 61.4,56 63.425,53.975 63.425,47.425 v1(63.4,47.4) ; v1(68.7,47.4) U1.F2@69.1,47.8
  MidLayer2 w0.15: v1(63.4,47.4) v1(68.7,47.4)
  Bottom Layer w0.15: v2(56.7,57.1) 56.8,57.2 X1.95@56.8,58.4 ; R11.1@63.4,49.6 63.424,49.624 v2(63.424,50.292)
A20: U1.F1 U3.4 X1.25 | length 16.5
  Top Layer w0.15: v2(63.9,50.3) 63.9,50.775 63.925,50.8 U3.4@63.925,51.6 ; v1@63.925,47.825 v2@63.925,50.3 ; v1(67.6,47.8) U1.F1@68.3,47.8
  MidLayer2 w0.15: v1(63.9,47.8) v1(67.6,47.8)
  Bottom Layer w0.15: X1.25@57.4,52.6 57.4,51.6 57.9,51.1 63.6,51.1 63.9,50.8 v2(63.9,50.3)
A21: U1.E1 U3.3 X1.96 | length 18.9
  Top Layer w0.15: v2(57.4,57.1) 57.4,56.5 57.6,56.3 61.6,56.3 64.425,53.475 64.425,48.675 v1(64.5,48.6) ; v1(67.5,48.6) U1.E1@68.3,48.6
  MidLayer2 w0.15: v1(64.5,48.6) v1(67.5,48.6)
  Bottom Layer w0.15: v2(57.4,57.1) X1.96@57.4,58.4
A22: U1.E2 U3.1 U11.97 X1.24 | length 59.4
  Top Layer w0.15: v2(56.286,34.29) 57.709,35.712 57.709,38.202 60.223,40.716 60.223,41.173 65.024,45.974 65.024,50.124 v2(65.4,50.5) ; v2@65.425,50.525 U3.1@65.425,51.6 ; v1(68.7,48.2) U1.E2@69.1,48.6
  MidLayer2 w0.15: v2(65.4,50.5) 65.649,50.749 66.345,50.749 67.294,49.8 68.2,49.8 68.6,49.4 68.9,49.4 69.1,49.2 69.1,48.6 v1(68.7,48.2)
  Bottom Layer w0.15: U11.97@33.9,35.2 44.852,35.2 45.406,34.646 46.507,34.646 47.193,33.96 51.308,33.96 51.994,34.646 53.696,34.646 54.026,34.315 v2@56.261,34.315 ; X1.24@58,52.6 58,51.6 58.2,51.4 64.5,51.4 v2(65.4,50.5)
A23: U1.D1 U3.30 U11.98 X1.97 | length 61.7
  Top Layer w0.15: v2(52.4,34.2) 52.4,36.423 56.185,40.208 56.185,43.028 56.109,43.104 ; U3.30@52.425,32.4 v2@52.425,34.175 ; v1(55.88,48.057) 55.88,43.307 56.096,43.091 ; v1(66.7,49.4) U1.D1@68.3,49.4
  MidLayer2 w0.15: 55.397,50.673 55.474,50.75 60.477,50.75 61.827,49.4 v1(66.7,49.4) ; v3(55.7,53.8) 55.397,53.497 55.397,48.539 v1(55.88,48.057) v1@55.957,48.057
  Bottom Layer w0.15: U11.98@33.9,34.7 41.605,34.7 42.32,33.985 46.66,33.985 46.99,33.655 51.855,33.655 v2(52.4,34.2) ; v3(55.7,53.8) 55.7,54.7 58,57 X1.97@58,58.4
A24: U1.D2 U3.56 | length 21.7
  Top Layer w0.15: v1(65.4,49) 66.9,47.5 66.9,41.475 65.711,40.286 65.5,40.075 65.5,33.5 65.425,33.425 U3.56@65.425,32.4 ; v1(68.7,49) U1.D2@69.1,49.4
  MidLayer2 w0.15: v1(65.4,49) v1(68.7,49)
A25: U1.P9 U2.66 | length 26
  Top Layer w0.15: v1(74.3,41) U1.P9@74.7,41.4
  MidLayer2 w0.15: v3(57,48.2) 67.9,48.2 68.3,47.8 68.9,47.8 69.1,47.6 69.1,41.5 69.2,41.4 73.9,41.4 v1(74.3,41)
  Bottom Layer w0.15: U2.66@56.7,46.76 56.7,47.9 v3(57,48.2)
A26: U1.P10 U2.24 | length 25.6
  Top Layer w0.15: v1(75.1,41) U1.P10@75.5,41.4
  MidLayer2 w0.15: v3(55.194,36.474) 55.626,36.043 63.456,36.043 64.999,34.5 65.742,34.5 66.65,35.408 71.108,35.408 75.1,39.4 v1(75.1,41)
  Bottom Layer w0.15: v3(55.194,36.474) 55.194,35.806 U2.24@55.2,35.8